# Altium PCB нижняя плата версия 1.PcbDoc
Units mm, origin at the board's own origin, x right, y up, seen from the top; angles counter-clockwise.
Board outline 60 x 53 mm, 4 copper layers (Top Layer, Layer 1, Layer 2, Bottom Layer), stack 0.603 mm thick; 106 components, 101 nets, 524 pads, 61 vias.
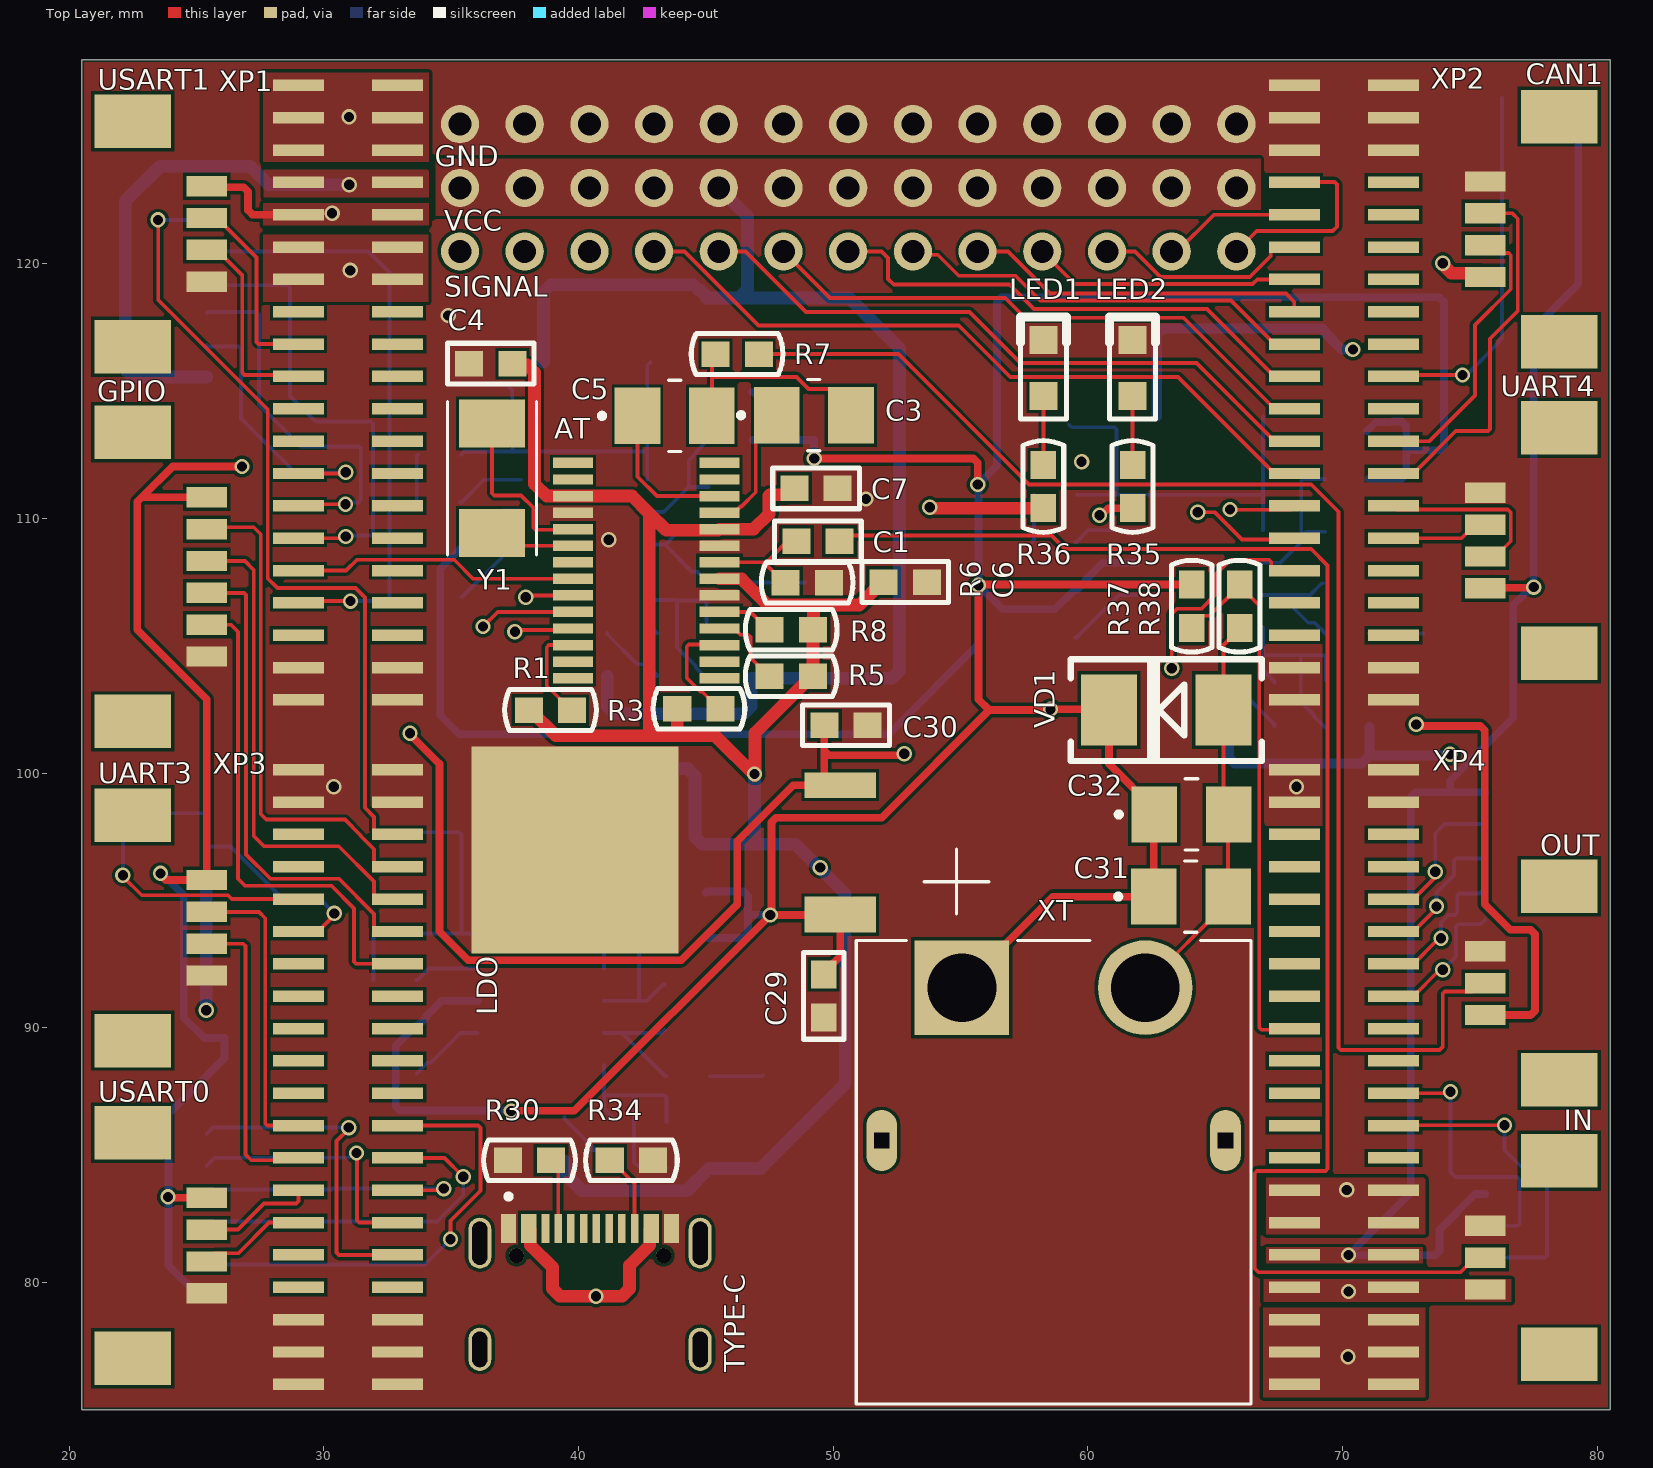
[diagram p0: Top Layer view]
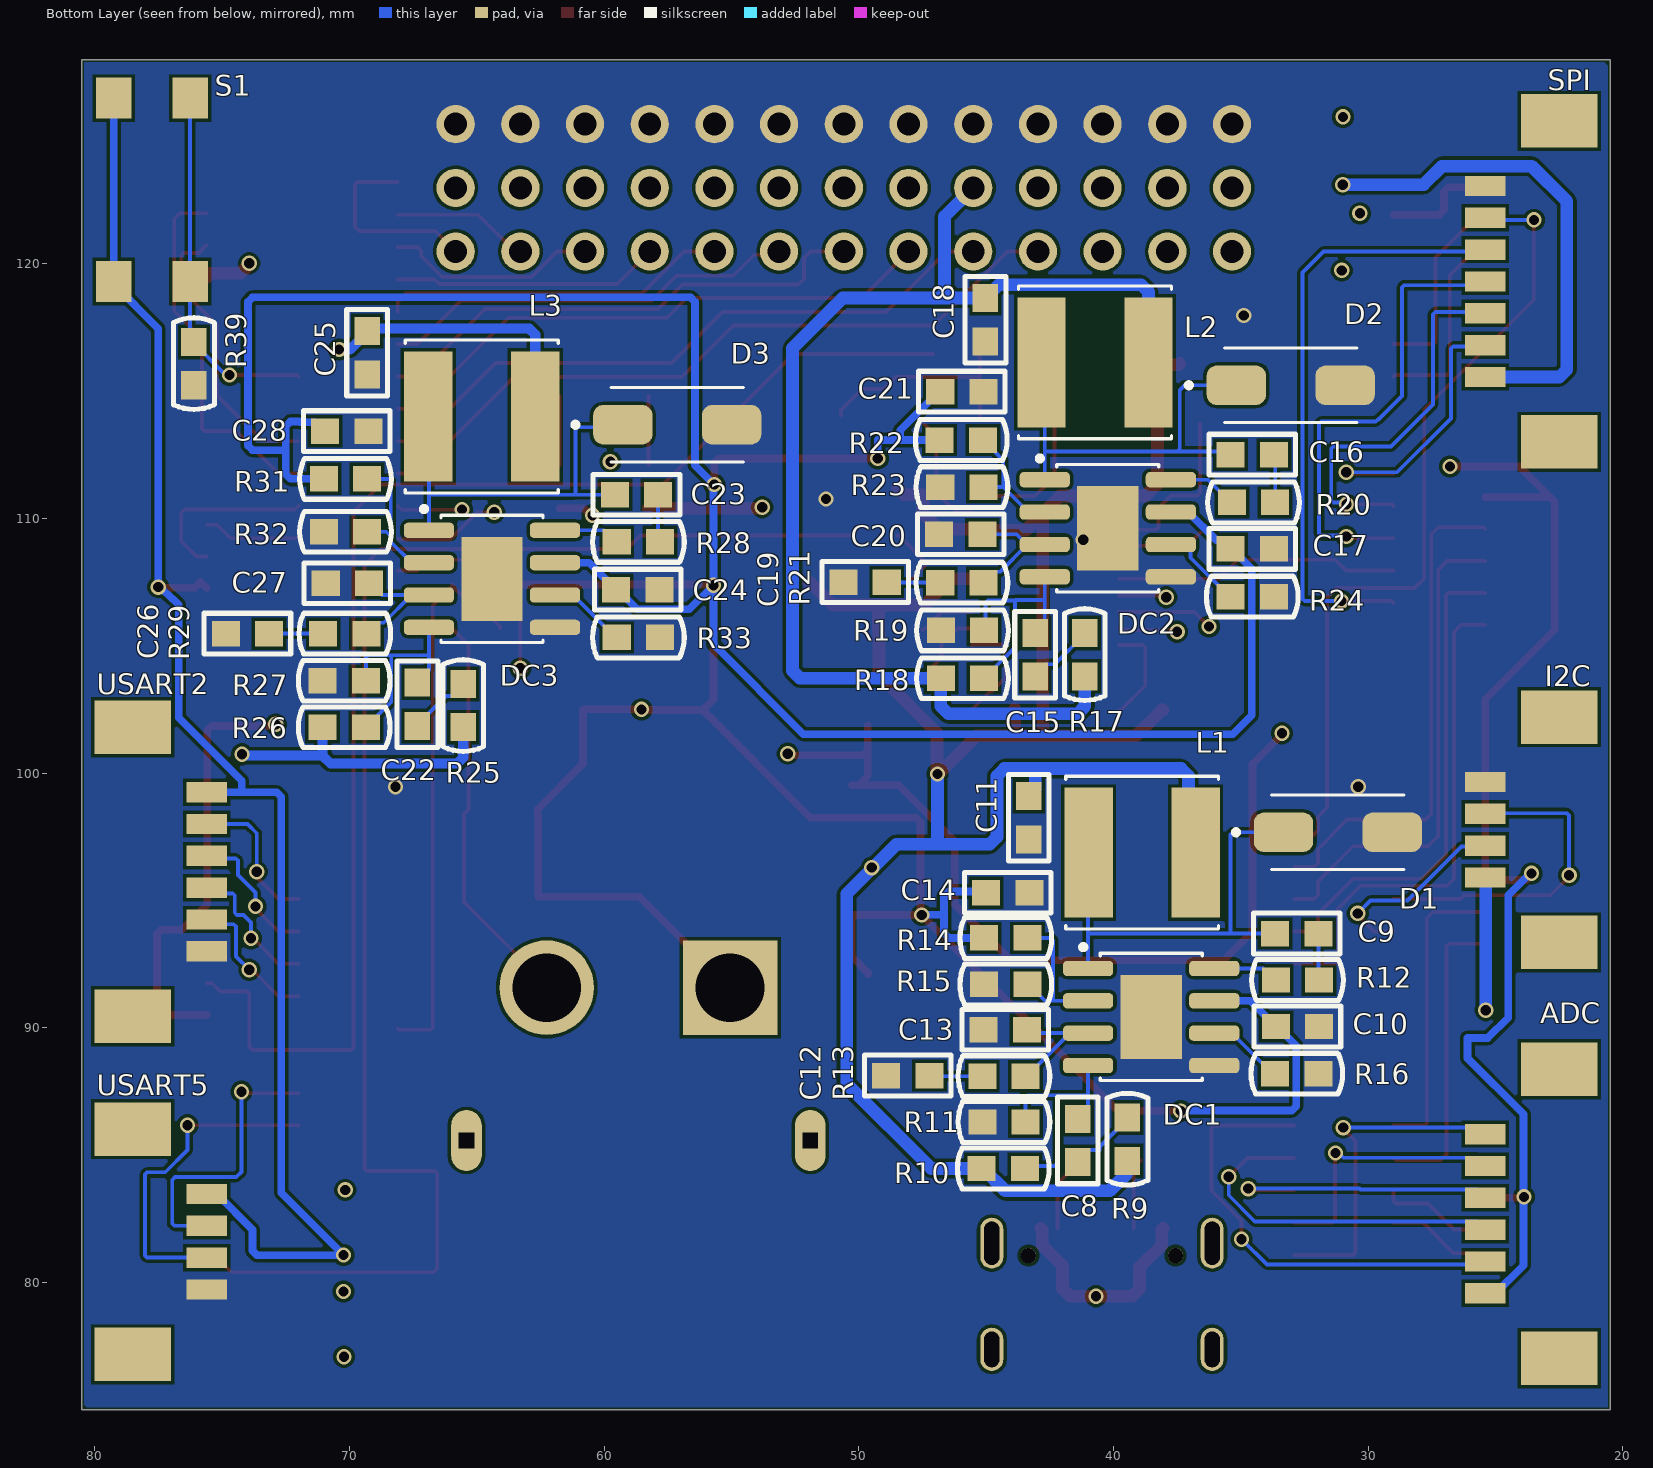
[diagram p1: Bottom Layer view, seen from below]
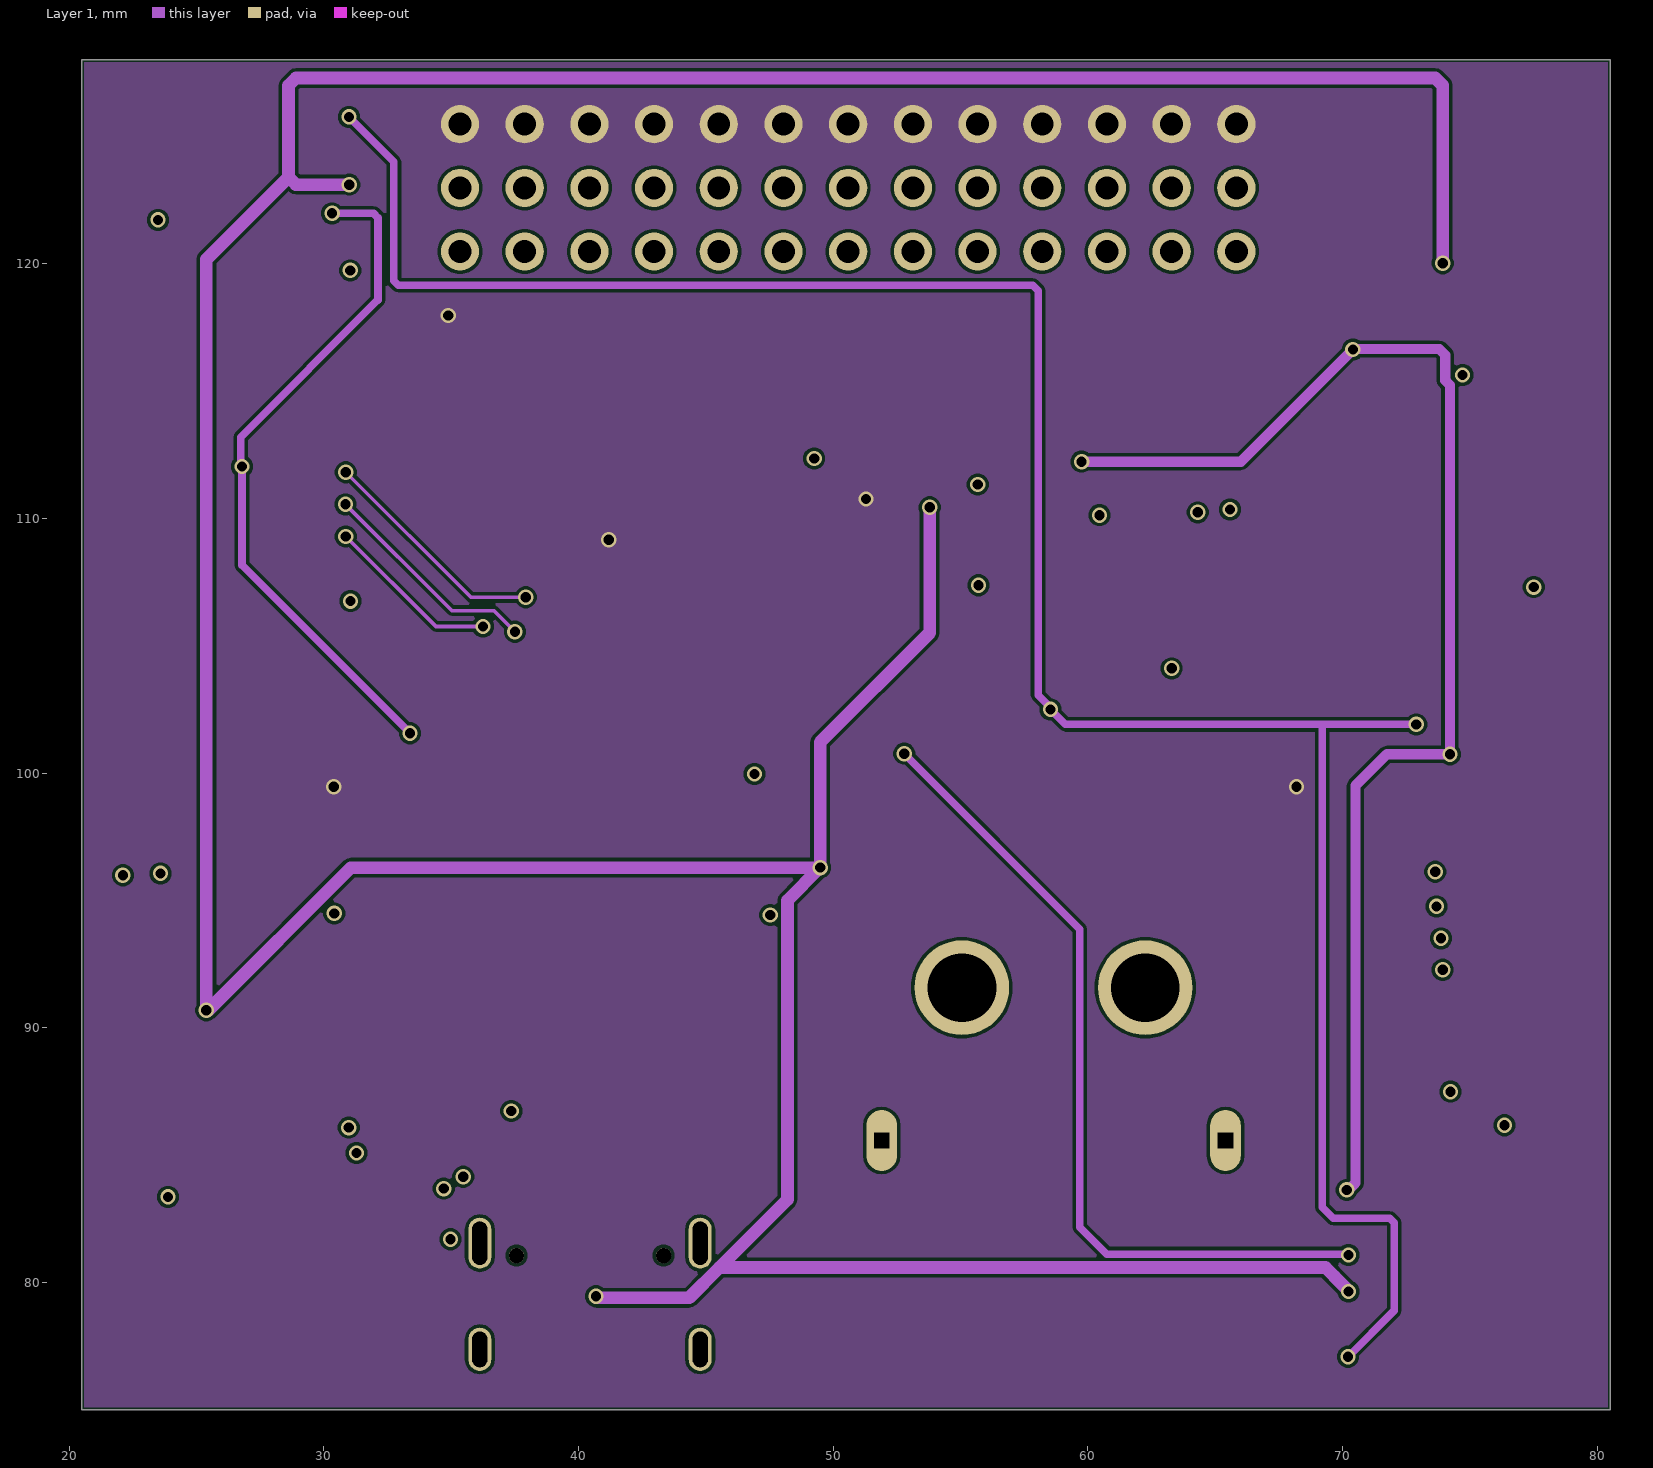
[diagram p2: Layer 1]
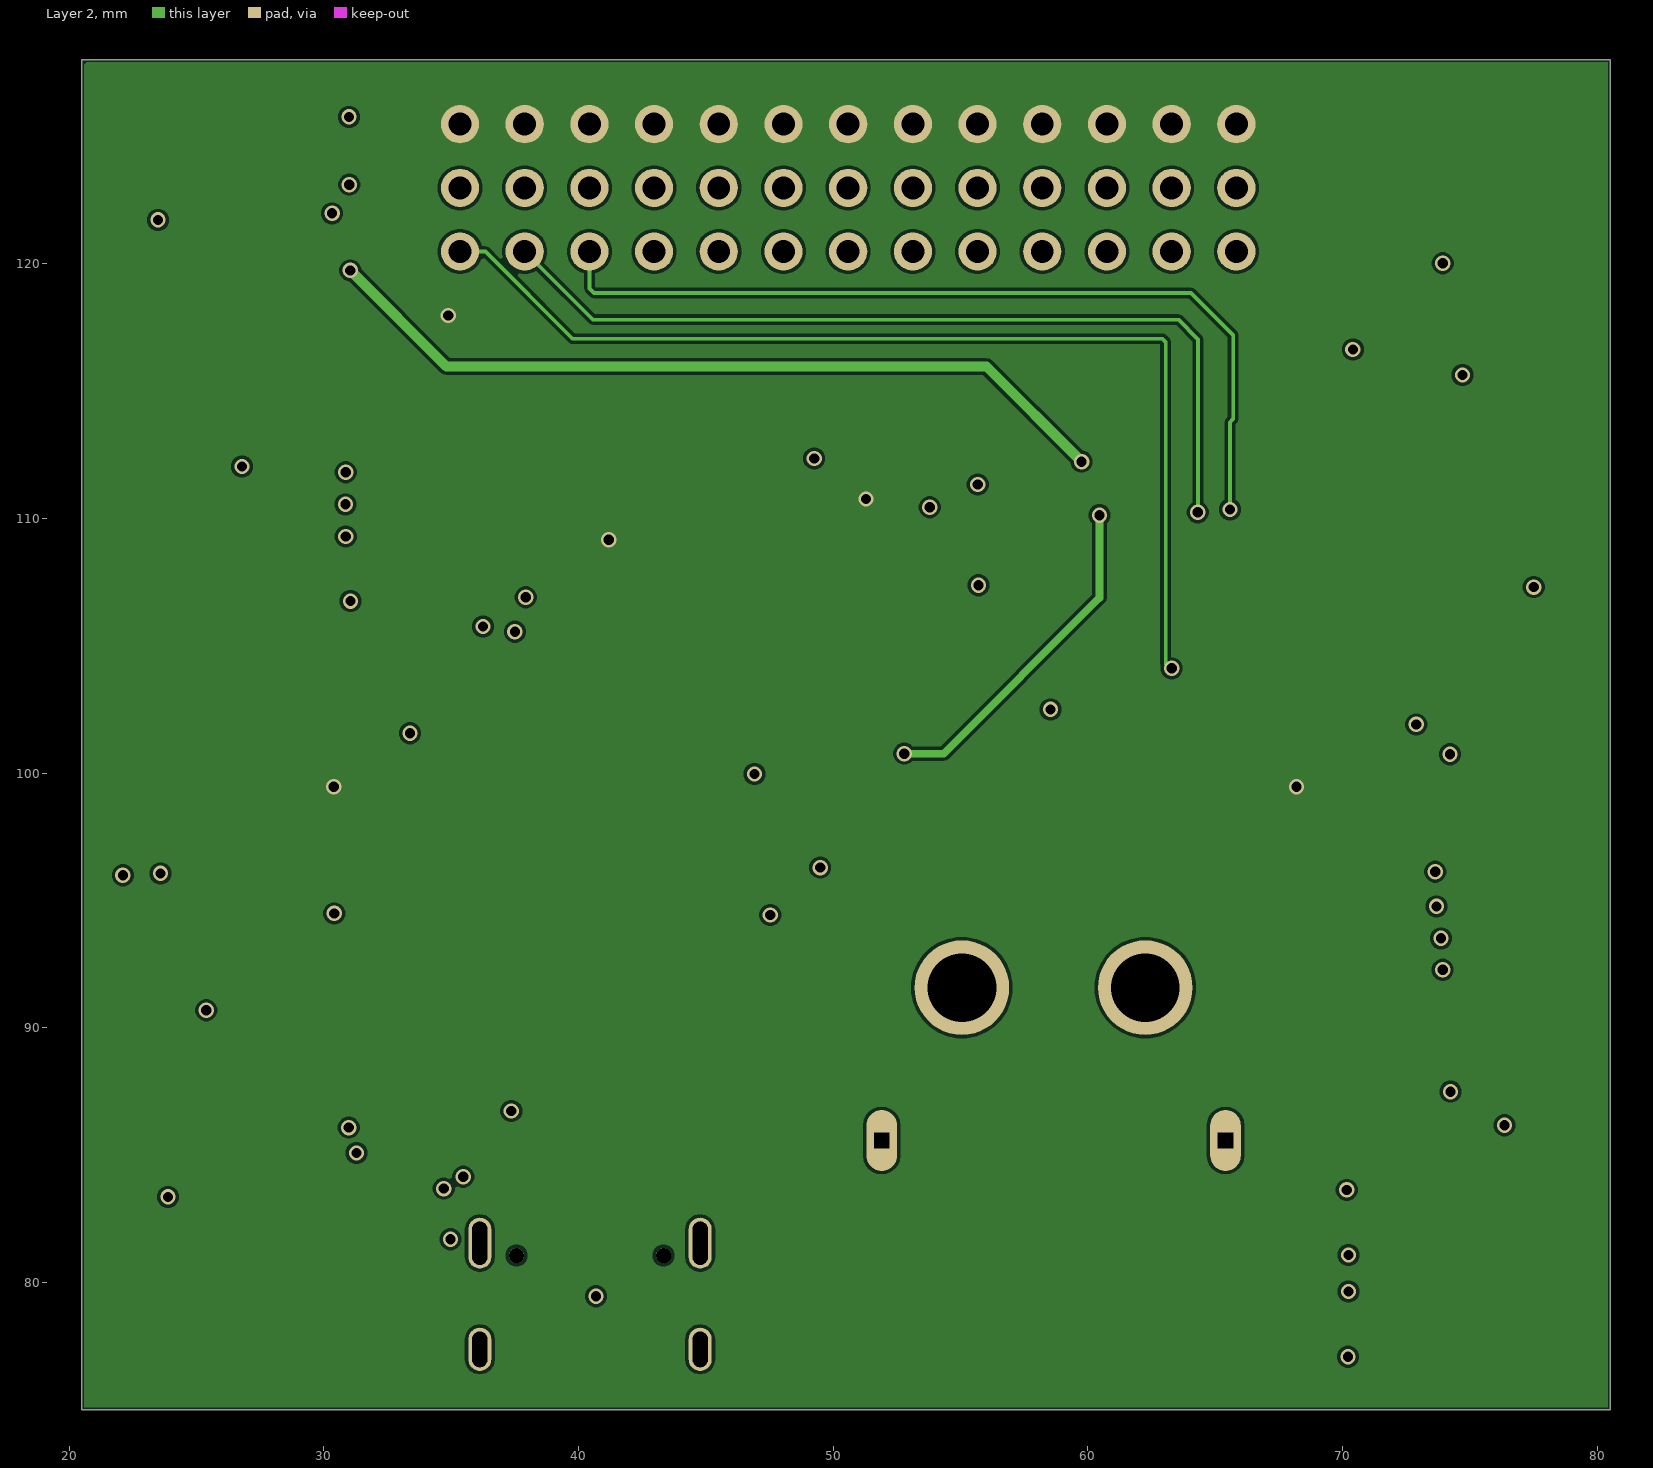
[diagram p3: Layer 2]
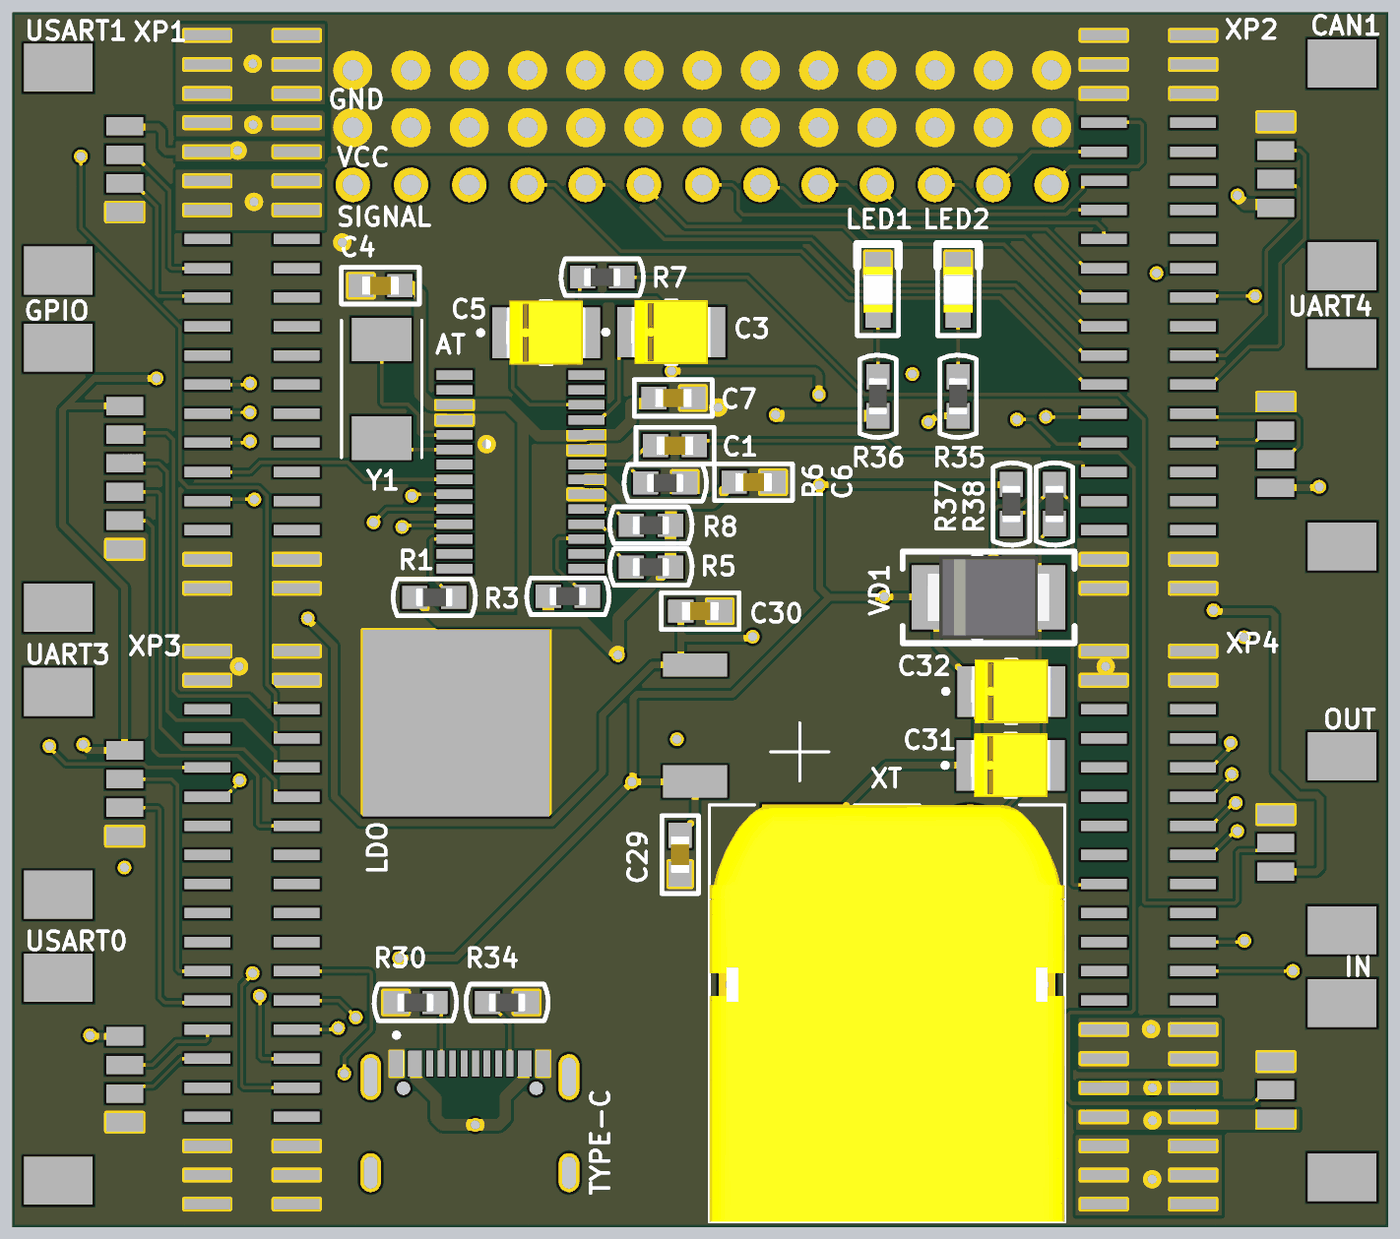
[diagram p4: 3D render of the assembled board from above, using the file's embedded part models]
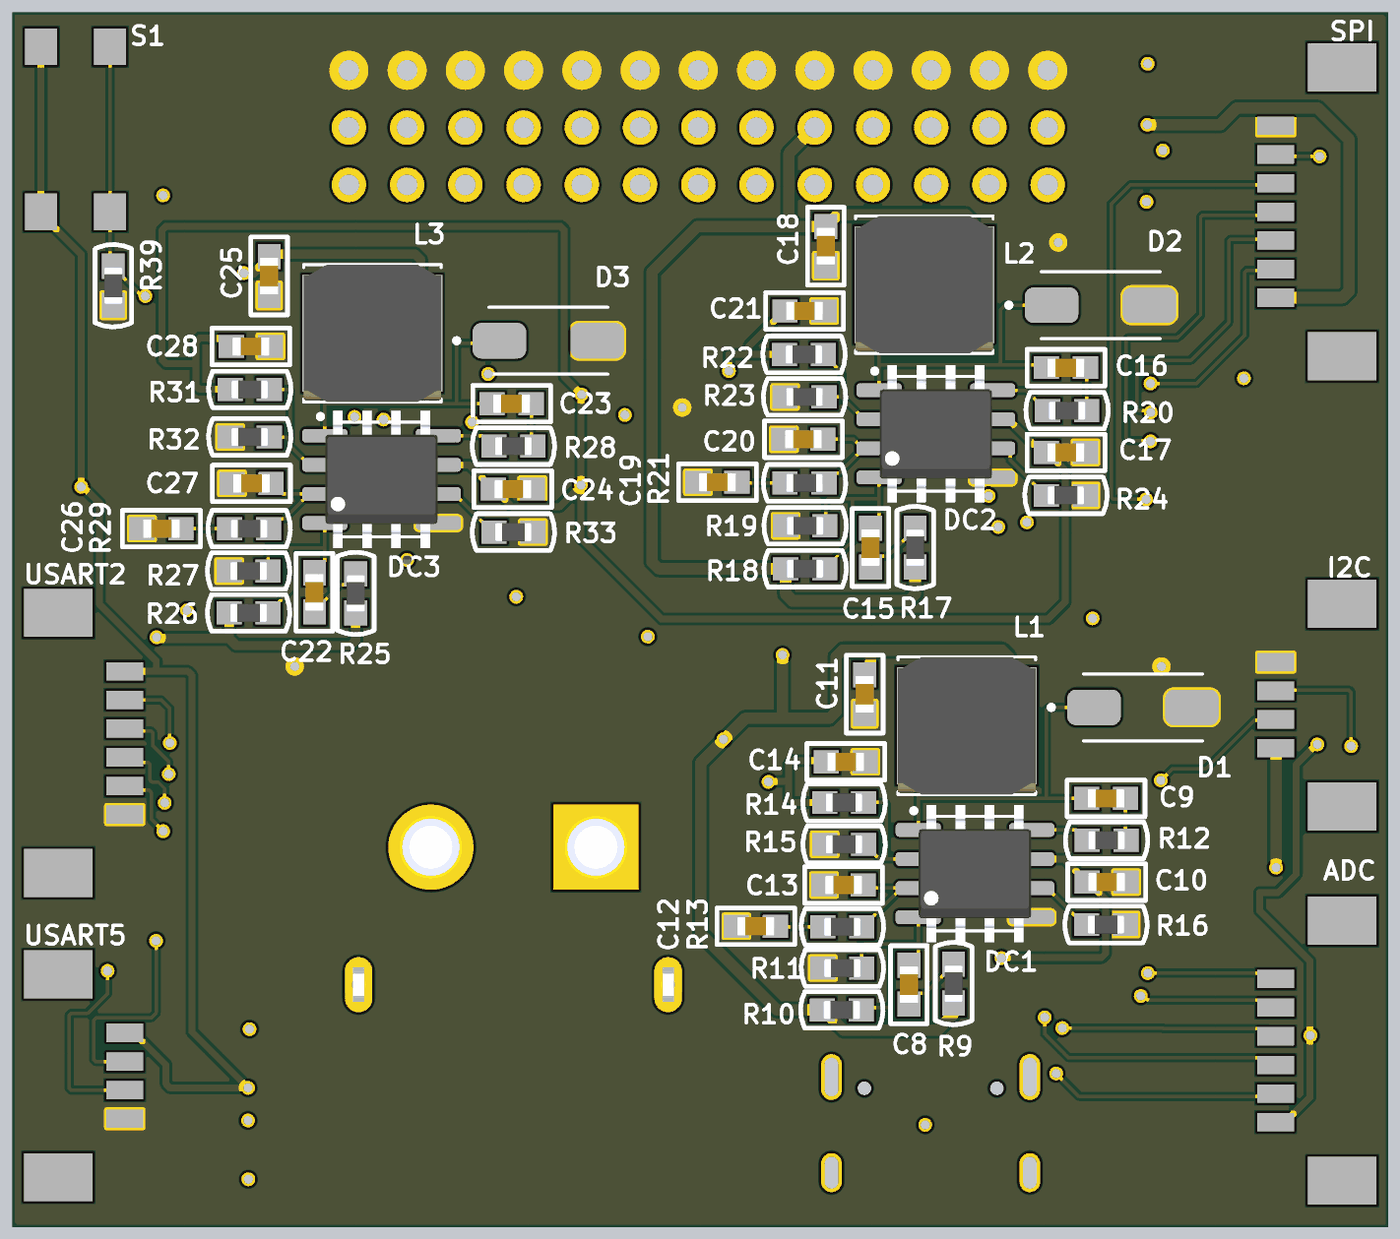
[diagram p5: 3D render of the assembled board from below, using the file's embedded part models]

## Layer stack, top to bottom
Top Solder: solder mask 0.0102, Solder Resist, Dk 3.5
Top Layer: signal copper 0.0356
Dielectric 2: prepreg 0.0711, PP-006, Dk 4.1
Layer 1: signal copper 0.035
Dielectric 1: dielectric 0.32, FR-4, Dk 4.8
Layer 2: signal copper 0.035
Dielectric 3: prepreg 0.0711, PP-006, Dk 4.1
Bottom Layer: signal copper 0.0356
Bottom Solder: solder mask 0.0102, Solder Resist, Dk 3.5

## Board outline
20.5,75 80.5,75 80.5,128 20.5,128

## Design rules (kind name [scope] priority, off if disabled: settings)
Clearance [All] p1: gap=0.125 ignorepadtopadclearanceinfootprint=FALSE except(0: Arc-Hole Track-Hole SMDPad-Hole THPad-Hole Via-Hole Fill-Hole Poly-Hole Region-Hole Text-Hole; 0.2: Arc-Region Track-Region SMDPad-Region THPad-Region Via-Region Fill-Region Poly-Region Region-Region)
PolygonConnect [All] p1: connectstyle=Direct reliefconductorwidth=0.254 reliefentries=4 polygonreliefangle="90 Angle" airgapwidth=0.254
RoutingVias [All] p1: holewidth=0.4 width=0.6 viastyle="Through Hole" minholewidth=0.4 minwidth=0.6 maxholewidth=0.4 maxwidth=0.6
SolderMaskExpansion [All] p1: expansion=0.102 istentingtop=FALSE
Width Width_6 [InNet('SERVO')] p1: maxlimit=0.5 minlimit=0.5 preferedwidth=0.5 minimp=50.000000 maximp=50.000000 favimp=50.000000
Width Width_5 [InNet('VCC')] p2: maxlimit=0.3 minlimit=0.3 preferedwidth=0.3 minimp=50.000000 maximp=50.000000 favimp=50.000000
Width Width_4 [InNet('GND')] p3: maxlimit=0.6 minlimit=0.6 preferedwidth=0.6 minimp=50.000000 maximp=50.000000 favimp=50.000000
Width Width_3 [InNet('5V')] p4: maxlimit=0.5 minlimit=0.5 preferedwidth=0.5 minimp=50.000000 maximp=50.000000 favimp=50.000000
Width Width_2 [InNet('4V2')] p5: maxlimit=0.4 minlimit=0.4 preferedwidth=0.4 minimp=50.000000 maximp=50.000000 favimp=50.000000
Width Width_1 [InNet('3V3')] p6: maxlimit=0.3 minlimit=0.3 preferedwidth=0.3 minimp=50.000000 maximp=50.000000 favimp=50.000000
Width [All] p7: maxlimit=0.15 minlimit=0.15 preferedwidth=0.15 minimp=50.000000 maximp=50.000000 favimp=50.000000
30 further rules are at their usual default settings.

## Components (designator, comment, footprint, x,y, rotation, side; value= is the part's Value field where it differs from the comment)
ADC "Header 1x6" "PicoBlade 6pin" 23.75,82.64 r90 bottom
AT "AT7456" at7456 42.577,107.401 r0 top
C1 "Capacitor" C0603 49.4,109.1 r0 top
C3 "T493B105K025BC6120" CAPPM3528X210N 49.235,114.05 r0 top
C4 "Capacitor" C0603 36.55,116.075 r180 top
C5 "T493B105K025BC6120" CAPPM3528X210N 43.775,114.025 r0 top
C6 "Capacitor" C0603 52.825,107.5 r0 top
C7 "Capacitor" C0603 49.325,111.175 r0 top
C8 "22 pF" C0603 41.4,85.575 r90 bottom
C9 "0.1 uF" C0603 32.8,93.7 r0 bottom
C10 "0.1 uF" C0603 32.775,90.05 r0 bottom
C11 "22 uF" C0603 43.325,98.25 r270 bottom
C12 "330 pF" C0603 48.075,88.125 r0 bottom
C13 "1 pF" C0603 44.25,89.925 r0 bottom
C14 "4.7 uF" C0603 44.15,95.3 r0 bottom
C15 "22 pF" C0603 43.075,104.65 r90 bottom
C16 "0.1 uF" C0603 34.55,112.5 r0 bottom
C17 "0.1 uF" C0603 34.55,108.8 r0 bottom
C18 "22 uF" C0603 45.025,117.8 r270 bottom
C19 "330 pF" C0603 49.75,107.5 r0 bottom
C20 "1 pF" C0603 46,109.375 r0 bottom
C21 "4.7 uF" C0603 45.95,114.975 r0 bottom
C22 "22 pF" C0603 67.325,102.7 r90 bottom
C23 "0.1 uF" C0603 58.725,110.925 r0 bottom
C24 "0.1 uF" C0603 58.675,107.2 r0 bottom
C25 "33 uF" C0603 69.3,116.5 r270 bottom
C26 "330 pF" C0603 74,105.475 r0 bottom
C27 "2 pF" C0603 70.075,107.45 r0 bottom
C28 "4.7 uF" C0603 70.1,113.425 r0 bottom
C29 "0.1 uF" C0603 49.625,91.25 r90 top
C30 "10 uF" C0603 50.5,101.875 r180 top
C31 "T493B105K025BC6120" CAPPM3528X210N 64.04,95.15 r0 top
C32 "T493B105K025BC6120" CAPPM3528X210N 64.065,98.375 r0 top
CAN1 "Header 1x4" "PicoBlade 4pin" 77.125,121.315 r90 top
D1 "B340A-13-F" DIOM5226X240N 31.19,97.675 r180 bottom
D2 "B340A-13-F" DIOM5226X240N 33.04,115.225 r180 bottom
D3 "B340A-13-F" DIOM5226X240N 57.125,113.675 r180 bottom
DC1 "MP1584EN" SOIC127P600X170-9N 38.518,90.425 r180 bottom
DC2 "MP1584EN" SOIC127P600X170-9N 40.222,109.611 r180 bottom
DC3 "MP1584EN" SOIC127P600X170-9N 64.4,107.625 r180 bottom
GND "SERVO" SERV 50.458,125.475 r0 top
GPIO "Header 1x6" "PicoBlade 6pin" 23.75,107.76 r270 top
I2C "I2C 1x4" "PicoBlade 4pin" 23.875,97.74 r90 bottom
IN "IN 1x3" "PicoBlade 3pin" 78.25,81.015 r90 top
L1 "12.3 uH" IND_VLS6045EX-150M 38.875,96.875 r180 bottom
L2 "12.3 uH" IND_VLS6045EX-150M 40.725,116.125 r180 bottom
L3 "12.3 uH" IND_VLS6045EX-150M 64.8,114 r180 bottom
LDO "КФ1158Н" ТО-263 49.253,94.318 r90 top
LED1 "Text" LD0805 58.25,115.9 r90 top
LED2 "Text" LD0805 61.75,115.9 r90 top
OUT "OUT 1x3" "PicoBlade 3pin" 78.25,91.79 r90 top
R1 "1 kOm" R0603 38.9,102.475 r180 top
R3 "1 kOm" R0603 44.725,102.525 r180 top
R5 "1 kOm" R0603 48.35,103.8 r0 top
R6 "10 kOm" R0603 48.975,107.475 r180 top
R7 "10 kOm" R0603 46.225,116.45 r0 top
R8 "10 kOm" R0603 48.35,105.625 r0 top
R9 "0" R0603 39.45,85.625 r270 bottom
R10 "124 kOm" R0603 44.325,84.475 r0 bottom
R11 "23.7 kOm" R0603 44.3,86.3 r0 bottom
R12 "0" R0603 32.775,91.875 r0 bottom
R13 "76.8 kOm" R0603 44.3,88.1 r180 bottom
R14 "100 kOm" R0603 44.225,93.525 r0 bottom
R15 "18.7 kOm" R0603 44.225,91.7 r0 bottom
R16 "193.38 kOm" R0603 32.8,88.2 r180 bottom
R17 "0" R0603 41.125,104.65 r270 bottom
R18 "124 kOm" R0603 45.925,103.725 r0 bottom
R19 "23.7 kOm" R0603 45.925,105.6 r0 bottom
R20 "0" R0603 34.5,110.625 r0 bottom
R21 "76.8 kOm" R0603 45.95,107.475 r180 bottom
R22 "100 kOm" R0603 45.975,113.075 r0 bottom
R23 "18.7 kOm" R0603 45.95,111.225 r0 bottom
R24 "193.38 kOm" R0603 34.55,106.925 r180 bottom
R25 "0" R0603 65.525,102.65 r270 bottom
R26 "124 kOm" R0603 70.2,101.8 r0 bottom
R27 "29 kOm" R0603 70.2,103.625 r0 bottom
R28 "0" R0603 58.65,109.075 r0 bottom
R29 "100 kOm" R0603 70.175,105.475 r180 bottom
R30 "10 kOm" R0603 38.075,84.8 r180 top
R31 "100 kOm" R0603 70.15,111.55 r0 bottom
R32 "18.7 kOm" R0603 70.15,109.475 r0 bottom
R33 "193.38 kOm" R0603 58.65,105.325 r180 bottom
R34 "10 kOm" R0603 42.075,84.8 r0 top
R35 "10 kOm" R0603 61.75,111.25 r270 top
R36 "10 kOm" R0603 58.25,111.25 r270 top
R37 "" R0603 64.075,106.55 r270 top
R38 "" R0603 65.95,106.55 r90 top
R39 "10 kOm" R0603 76.1,116.075 r90 bottom
S1 "SW-PB" SWIT 77.901,122.944 r270 bottom
SIGNAL "SERVO" SERV 50.458,120.475 r0 top
SPI "SPI 1x7" "PicoBlade 7pin" 25.375,119.265 r90 bottom
TYPE-C "TYPE-C-31-M-12" HRO_TYPE-C-31-M-12 40.45,77.375 r0 top
UART3 "UART 1x4" "PicoBlade 4pin" 23.875,93.96 r270 top
UART4 "UART 1x4" "PicoBlade 4pin" 77.125,109.09 r90 top
USART0 "UART 1x4" "PicoBlade 4pin" 23.875,81.485 r270 top
USART1 "UART 1x4" "PicoBlade 4pin" 23.875,121.2 r270 top
USART2 "UART 1x6" "PicoBlade 6pin" 77.25,96.185 r270 bottom
USART5 "UART 1x4" "PicoBlade 4pin" 77.125,81.635 r270 bottom
VCC "SERVO" SERV 50.458,122.975 r0 top
VD1 "Schottky" DO-214AA 63.075,102.475 r180 top
XP1 "PLLD-1.27-40S" "Headr 2x20 male" 30.947,115.149 r0 top
XP2 "PLLD-1.27-40S" "Headr 2x20 male" 70.047,115.149 r0 top
XP3 "PLLD-1.27-40S" "Headr 2x20 male" 30.947,88.279 r0 top
XP4 "PLLD-1.27-40S" "Headr 2x20 male" 70.047,88.279 r0 top
XT "XT60PW-M" AMASS_XT60PW-M 58.65,85.575 r180 top
Y1 "ABM7-8.000MHZ-8-R80-D2Y-T" XTAL_ABM7-8.000MHZ-8-R80-D2Y-T 36.6,111.575 r90 top

## Footprints (in the part's own frame and the unit in brackets; to place one, negate y for a bottom-side part, rotate by r counter-clockwise, add the part's x,y. Pads: shape width x height; smd on the part's side, far side on the other; paste and mask are expansions set on the pad)
AMASS_XT60PW-M [mm]
  rect 3.716x3.716 / inner round 3.716 / far side rect 3.716x3.716 hole 2.7: 1(3.6,-6)
  round 3.716 hole 2.7: 2(-3.6,-6)
  oval 1.2x2.4 hole 0.6 square: S1(6.75,0) S2(-6.75,0)
  silkscreen extent -7.75,-11.43 7.75,10.35, body extent -7.75,-7.85 7.75,10.35, height 8.4
at7456 [mm]
  rect 1.57x0.41 smd: 1(-2.794,4.774) 2(-2.794,4.124) 3(-2.794,3.474) 4(-2.794,2.824) 5(-2.794,2.174) 6(-2.794,1.524) 7(-2.794,0.874) 8(-2.794,0.224) 9(-2.794,-0.426) 10(-2.794,-1.076) 11(-2.794,-1.726) 12(-2.794,-2.376) 13(-2.794,-3.026) 14(-2.794,-3.676) 15(2.956,-3.676) 16(2.956,-3.026) 17(2.956,-2.376) 18(2.956,-1.726) 19(2.956,-1.076) 20(2.956,-0.426) 21(2.956,0.224) 22(2.956,0.874) 23(2.956,1.524) 24(2.956,2.174) 25(2.956,2.824) 26(2.956,3.474) 27(2.956,4.124) 28(2.956,4.774)
C0603 [mm] "1608M"
  rect 1.1x1 smd: 1(-0.85,0) 2(0.85,0)
  silkscreen extent -1.7,-0.8 1.7,0.8, body extent -0.8,-0.4 0.8,0.4, height 0.91
CAPPM3528X210N [mm]
  rect 1.79x2.21 smd: 1(-1.46,0) 2(1.46,0)
  silkscreen extent -2.95,-1.4 0.25,1.4, body extent -1.75,-1.4 1.75,1.4, height 2.1
DIOM5226X240N [mm]
  rrect50% 2.33x1.55 smd: A(2.135,0) C(-2.135,0)
  silkscreen extent -4.1,-1.46 2.6,1.46
DO-214AA [mm] "(SMB) Low profile package"
  rect 2.2x2.8 smd: 1(-2.25,0) 2(2.25,0)
  silkscreen extent -3.75,-2 3.75,2, body extent -2.7,-1.8 2.7,1.8, height 2.3
"Headr 2x20 male" [mm]
  rect 2x0.45 smd: 1(-1.947,11.851) 2(1.953,11.851) 3(-1.947,10.581) 4(1.953,10.581) 5(-1.947,9.311) 6(1.953,9.311) 7(-1.947,8.041) 8(1.953,8.041) 9(-1.947,6.771) 10(1.953,6.771) 11(-1.947,5.501) 12(1.953,5.501) 13(-1.947,4.231) 14(1.953,4.231) 15(-1.947,2.961) 16(1.953,2.961) 17(-1.947,1.691) 18(1.953,1.691) 19(-1.947,0.421) 20(1.953,0.421) 21(-1.947,-0.849) 22(1.953,-0.849) 23(-1.947,-2.119) 24(1.953,-2.119) 25(-1.947,-3.389) 26(1.953,-3.389) 27(-1.947,-4.659) 28(1.953,-4.659) 29(-1.947,-5.929) 30(1.953,-5.929) 31(-1.947,-7.199) 32(1.953,-7.199) 33(-1.947,-8.469) 34(1.953,-8.469) 35(-1.947,-9.739) 36(1.953,-9.739) 37(-1.947,-11.009) 38(1.953,-11.009) 39(-1.947,-12.279) 40(1.953,-12.279)
HRO_TYPE-C-31-M-12 [mm]
  rect 0.6x1.14 smd mask+0.05: A1_B12(-3.2,4.75) A4_B9(-2.4,4.75) B1_A12(3.2,4.75) B4_A9(2.4,4.75)
  rect 0.3x1.14 smd mask+0.05: A5(-1.25,4.75) A6(-0.25,4.75) A7(0.25,4.75) A8(1.25,4.75) B5(1.75,4.75) B6(0.75,4.75) B7(-0.75,4.75) B8(-1.75,4.75)
  oval 0.9x2 hole 0.6 slot 1.7 at 90 deg: S1(-4.325,4.17) S2(4.325,4.17)
  oval 0.9x1.7 hole 0.6 slot 1.4 at 90 deg: S3(-4.325,0) S4(4.325,0)
  round 0.6 hole 0.6 unplated: ""(-2.89,3.68) ""(2.89,3.68)
  silkscreen extent -3.3,5.9 -3.1,6.1
IND_VLS6045EX-150M [mm]
  rect 1.9x5.1 smd: 1(-2.1,0) 2(2.1,0)
  silkscreen extent -3,-3 3,3, body extent -3,-3 3,3, height 4.5
LD0805 [mm]
  rect 1.1x1.1 smd: 1(-1.1,0) 2(1.1,0)
  silkscreen extent -2,-0.9 2,0.9, body extent -1,-0.62 1,0.63, height 0.73
"PicoBlade 3pin" [mm]
  rect 0.8x1.6 smd: 1(-1.29,2.65) 2(-0.04,2.65) 3(1.21,2.65)
  rect 2.1x3 smd: S(-3.84,-0.25) S(3.76,-0.25)
"PicoBlade 4pin" [mm]
  rect 0.8x1.6 smd: 1(-1.84,1.525) 2(-0.59,1.525) 3(0.66,1.525) 4(1.91,1.525)
  rect 2.1x3 smd: S(-4.39,-1.375) S(4.46,-1.375)
"PicoBlade 6pin" [mm]
  rect 0.8x1.6 smd: 1(-3.065,1.65) 2(-1.815,1.65) 3(-0.565,1.65) 4(0.685,1.65) 5(1.935,1.65) 6(3.185,1.65)
  rect 2.1x3 smd: S(-5.615,-1.25) S(5.735,-1.25)
"PicoBlade 7pin" [mm]
  rect 0.8x1.6 smd: 1(-3.715,0.025) 2(-2.465,0.025) 3(-1.215,0.025) 4(0.035,0.025) 5(1.285,0.025) 6(2.535,0.025) 7(3.785,0.025)
  rect 2.1x3 smd: S(-6.265,-2.875) S(6.335,-2.875)
R0603 [mm] "1608M"
  rect 1.1x1 smd: 1(-0.85,0) 2(0.85,0)
  silkscreen extent -1.8,-0.8 1.8,0.8, body extent -0.8,-0.4 0.8,0.4, height 0.38
SERV [mm]
  round 1.5 hole 0.9: 1(-15.113,0) 2(-12.573,0) 3(-10.033,0) 4(-7.493,0) 5(-4.953,0) 6(-2.413,0) 7(0.127,0) 8(2.667,0) 9(5.207,0) 10(7.747,0) 11(10.287,0) 12(12.827,0) 13(15.367,0)
SOIC127P600X170-9N [mm]
  rrect54% 1.97x0.6 smd: 1(-2.475,1.905) 2(-2.475,0.635) 3(-2.475,-0.635) 4(-2.475,-1.905) 5(2.475,-1.905) 6(2.475,-0.635) 7(2.475,0.635) 8(2.475,1.905)
  rect 2.41x3.3 smd paste-3: 9(0,0)
  silkscreen extent -2.77,-2.5 2,2.84, body extent -2.45,-3 2.45,3, height 1.7
SWIT [mm]
  rect 1.6x1.4 smd: 1(-3.556,1.651) 1(3.644,1.651) 2(-3.556,-1.349) 2(3.644,-1.349)
XTAL_ABM7-8.000MHZ-8-R80-D2Y-T [mm]
  rect 1.9x2.6 smd: 1(-2.15,0) 2(2.15,0)
  silkscreen extent -3,-1.75 3,1.75
ТО-263 [mm]
  rect 1.4x2.79 smd: 1(0.127,-1.022)
  rect 8.13x8.13 smd: 2(2.667,9.398)
  rect 0.99x2.79 smd: 3(5.207,-1.022)

## Part data
AT: "OSD"
C3 C5 C31 C32: "Tantalum Surface Mount Capacitors", Package="SMD-2 Kemet", Availability="In Stock", Check_prices=https://www.snapeda.com/parts/T493B105K025BC6120/KEMET/view-part/?ref=eda, MF=KEMET, MP=T493B105K025BC6120, Price=None, SnapEDA_Link=https://www.snapeda.com/parts/T493B105K025BC6120/KEMET/view-part/?ref=snap
C8 C9 C10 C11 C12 C13 C14 C15 C16 C17 C18 C19 C20 C21 C22 C23 C24 C25 C26 C27 C28 C29 C30: library part Capacitor, Published=18.05.2010, Publisher="Andrew Danich", Type=Конденсатор
D1 D2 D3: "Diode, Rectifier, 3a, 40v, Do-214ac, Full Reel", Package=None, Availability=Unavailable, MP=B340A-13-F, Price=None
L1 L2 L3: library part VLS6045EX-150M, "15 ÂµH Shielded Drum Core, Wirewound Inductor 2.5 A 75mOhm Nonstandard", Package="NON STANDARD-2 TDK", Availability="In Stock", Check_prices=https://www.snapeda.com/parts/VLS6045EX-150M/TDK/view-part/?ref=eda, MF=TDK, MP=VLS6045EX-150M, Price=None, Purchase-URL=https://pricing.snapeda.com/search/part/VLS6045EX-150M/?ref=eda, SnapEDA_Link=https://www.snapeda.com/parts/VLS6045EX-150M/TDK/view-part/?ref=snap
LED1 LED2: library part Led-1, Published=03.12.2013, Publisher="Andrew Danich", Type="Индикатор единичный"
R1 R3 R5 R6 R7 R8 R9 R10 R11 R12 R13 R14 R15 R16 R17 R18 R19 R20 R21 R22 R23 R24 R25 R26 R27 R28 R29 R30 R31 R32 R33 R34 R35 R36 R37 R38 R39: library part Resistor, Published=24.03.2010, Publisher="Andrew Danich", Type=Резистор
S1: "Switch", LatestRevisionDate=17-Jul-2002, LatestRevisionNote="Re-released for DXP Platform.", PackageDescription="Switch; 2 Leads", PackageReference=SPST-2, Published=24-Mar-1999, Publisher="Altium Limited"
Y1: "Crystal 22.1184MHz Ã‚Â±20ppm (Tol) Ã‚Â±30ppm (Stability) 18pF FUND 50Ohm 2-Pin Mini-CSMD T/R", Package=None, Availability=Unavailable, MP=ABM7-8.000MHZ-8-R80-D2Y-T, Price=None
C1 C4 C6 C7: Published=18.05.2010, Publisher="Andrew Danich", Type=Конденсатор
VD1: Published=18.05.2010, Publisher="Andrew Danich", Type=Диод

## Via types
v1: diameter 0.6, hole 0.4, Top Layer to Bottom Layer, 61 vias

## Nets (pads, with @x,y where several pads share a name; then routed paths per layer and width w, separated by ;. In a path a pad name is that pad's centre, name@x,y a point inside that pad or via, vN(x,y) a via of type N, cw(c..) or ccw(c..) an arc to the next point about the centre after c; other vN are vias at no path point)
3V3: ADC.1 C30.2 GPIO.1 LDO.3 R35.2 S1.2 UART3.1 UART4.1 USART0.1 USART1.1 USART2.1 USART5.1 XP1.9 XP1.10 XP4.31 XP4.32 | length 220.1
  Top Layer w0.3: v1@23.6,96 23.8,95.8 UART3.1 25.4,102.9 22.675,105.625 22.675,110.649 22.851,110.825 ; v1@23.886,83.325 USART0.1 ; GPIO.1 22.851,110.825 ; USART1.1 25.44,123 26.849,123 27.025,122.824 27.025,122.096 27.201,121.92 XP1.9 ; v1(26.788,112.036) 24.062,112.036 22.851,110.825 ; v1@33.4,101.5 34.538,100.362 34.538,93.783 35.676,92.645 44.034,92.645 46.229,94.84 46.229,97.33 48.425,99.525 LDO.3@49.995,99.525 ; C30.2 49.65,100.873 ; LDO.3 LDO.3@49.995,99.525 ; v1@52.8,100.7 49.823,100.7 49.65,100.873 ; v1(60.45,110.125) 60.525,110.125 60.8,110.4 R35.2 ; UART4.1 75.85,107.5 76.075,107.275 77.475,107.275 v1(77.5,107.3) ; 49.65,100.873 49.65,99.87 LDO.3@49.995,99.525
  Layer 1 w0.3: v1(30.325,121.975) 31.949,121.975 32.125,121.799 32.125,118.575 26.736,113.186 26.736,112.089 v1(26.788,112.036) 26.788,108.158 v1(33.386,101.561) ; v1(52.786,100.761) 59.675,93.872 59.675,82.175 60.736,81.114 70.186,81.114 v1(70.225,81.075)
  Layer 2 w0.3: v1(52.786,100.761) 54.336,100.761 60.45,106.875 v1(60.45,110.125)
  Bottom Layer w0.3: v1@23.6,96.1 24.5,95.2 24.5,90.4 25.3,89.6 26.1,89.6 26.1,88.8 23.9,86.6 23.9,80.675 25,79.575 ADC.1 ; USART5.1 75.2,83.475 73.8,82.075 73.8,81.251 73.624,81.075 v1(70.225,81.075) 72.675,83.525 72.675,99.074 72.851,99.25 74.225,99.25 ; USART2.1 74.225,99.25 ; S1.2@79.25,126.5 79.25,119.3 79.25,119.2 77.5,117.45 v1(77.5,107.3) 77.419,107.3 76.937,106.818 76.918,106.818 76.7,106.6 76.7,102.175 74.225,99.7 74.225,99.25
  other v1: 23.886,83.361 23.586,96.061
4V2: C25.1 L3.2 R25.2 R26.2 XP1.11 XP1.12 XP1.13 XP1.14 XP4.27 XP4.28 XP4.29 XP4.30 | length 106.7
  Layer 1 w0.4: v1(59.75,112.225) 66,112.225 v1(70.4,116.625) 70.425,116.65 73.791,116.65 74.025,116.416 74.025,115.416 74.211,115.231 v1(74.211,100.736) 71.736,100.736 70.5,99.5 70.5,83.9 v1@70.175,83.575
  Layer 2 w0.4: v1(31.036,119.736) 34.81,115.962 56.013,115.962 v1(59.75,112.225)
  Bottom Layer w0.4: L3.2 62.7,117.216 62.934,117.45 69.2,117.45 C25.1 69.3,117.3 69.975,116.625 v1(70.4,116.625) ; R25.2 65.525,100.609 65.759,100.375 70.741,100.375 71.05,100.684 ; R26.2 71.05,100.684 ; v1@74.225,100.675 74.216,100.684 71.05,100.684
  other v1: 70.161,83.636
5V: AT.3 AT.21 AT.24 C4.1 C6.1 C7.1 C11.1 CAN1.1 I2C.1 IN.1 L1.2 R1.2 R3.2 R5.2 R8.2 R9.2 R10.2 R36.2 SPI.1 TYPE-C.A4_B9 TYPE-C.B4_A9 XP1.7 XP1.8 XP4.33 XP4.34 | length 319.9
  Top Layer w0.5: C4.1 37.45,116.025 37.982,116.025 38.275,115.732 38.275,111.35 38.75,110.875 AT.3 42.1,110.875 42.772,110.203 ; TYPE-C.A4_B9 38.1,82.075 38.1,81.475 38.975,80.6 38.975,79.754 39.268,79.461 41.707,79.461 42,79.754 42,80.67 42.8,81.47 42.8,82.075 TYPE-C.B4_A9 ; R1.2 38.1,102.475 39.112,101.462 42.8,101.462 ; R3.2 43.875,101.487 43.85,101.462 ; AT.21 46.403,107.625 46.934,107.094 46.934,107.086 47.42,106.6 49.222,106.6 ; C7.1 48.225,110.925 47.518,110.925 47.475,110.882 47.475,110.175 46.875,109.575 AT.24 45.488,109.53 43.445,109.53 42.772,110.203 ; C6.1 51.925,107.5 51.025,106.6 49.222,106.6 ; v1@53.8,110.375 53.825,110.4 R36.2 ; v1@73.95,119.95 74.275,119.625 75.45,119.625 CAN1.1 ; 42.772,110.203 42.772,101.49 42.8,101.462 ; 42.8,101.462 43.85,101.462 ; 43.85,101.462 45.363,101.462 46.925,99.9 46.925,101.575 49.15,103.8 R5.2 R8.2 49.222,105.647 49.222,106.6
  Layer 1 w0.5: v1(25.386,90.686) 25.386,120.165 28.613,123.393 ; v1@25.423,90.648 31.061,96.286 v1(49.486,96.286) ; v1(31,123.1) 28.906,123.1 28.613,123.393 ; v1@40.7,79.4 44.347,79.4 45.536,80.589 ; v1(53.786,110.436) 53.786,105.511 49.486,101.211 v1(49.486,96.286) ; v1(70.225,79.65) 70.225,79.677 69.679,80.223 69.679,80.236 69.326,80.589 45.536,80.589 ; v1(73.927,120.016) 73.927,126.995 73.634,127.288 28.906,127.288 28.613,126.995 28.613,123.393 ; 45.536,80.589 48.2,83.253 48.2,95.001 v1(49.486,96.286)
  Bottom Layer w0.5: v1(25.386,90.686) 25.386,95.886 I2C.1 ; SPI.1 22.493,115.55 22.2,115.843 22.2,122.45 23.575,123.825 27.099,123.825 27.824,123.1 v1(31,123.1) ; L1.2 37.05,97.15 37.05,99.882 37.343,100.175 43.032,100.175 ; R9.2 39.475,84.75 39.475,84.268 40.143,83.6 44.25,83.6 45.125,84.475 R10.2 47.15,84.475 50.475,87.8 50.475,95.25 48.525,97.2 47.025,97.2 ; C11.1 43.075,99.35 43.075,100.132 43.032,100.175 ; v1(46.911,99.961) 46.911,97.314 47.025,97.2 ; 43.032,100.175 44.282,100.175 44.575,99.882 44.575,97.493 44.868,97.2 47.025,97.2
  other v1: 40.686,79.461
GND: AT.4 AT.20 AT.23 C4.2 C6.2 C7.2 C10.1 C11.2 C12.2 C13.2 C14.1 C17.1 C18.2 C19.2 C20.2 C21.1 C24.1 C25.2 C26.2 C27.2 C28.1 C29.1 C30.1 CAN1.4 D1.A D2.A D3.A DC1.5 DC1.9 DC2.5 DC2.9 DC3.5 DC3.9 GND.1 GND.2 GND.3 GND.4 GND.5 GND.6 GND.7 GND.8 GND.9 GND.10 GND.11 GND.12 GND.13 GPIO.6 I2C.4 IN.3 LDO.2 LED1.2 LED2.2 OUT.3 R6.1 R11.2 R15.2 R16.2 R19.2 R23.2 R24.2 R27.2 R30.2 R32.2 R33.2 R34.2 R39.1 SPI.7 TYPE-C.A1_B12 TYPE-C.B1_A12 UART3.4 UART4.4 USART0.4 USART1.4 USART2.6 USART5.4 XP1.37 XP1.38 XP1.39 XP1.40 XP2.1 XP2.2 XP2.3 XP2.4 XP2.5 XP2.6 XP2.37 XP2.38 XP2.39 XP2.40 XP3.1 XP3.2 XP3.3 XP3.4 XP3.35 XP3.36 XP3.37 XP3.38 XP3.39 XP3.40 XP4.1 XP4.2 XP4.3 XP4.4
  other v1: 30.386,99.461 68.186,99.461 41.186,109.161 51.286,110.761 34.886,117.961
NetADC_2: ADC.2 XP3.24 | length 18.2
  Top Layer w0.15: XP3.24 36.062,86.16 36.15,86.072 36.15,83.6 34.975,82.425 v1(34.975,81.7)
  Bottom Layer w0.15: ADC.2 25.525,80.7 33.975,80.7 v1(34.975,81.7)
NetADC_3: ADC.3 XP3.26 | length 14.2
  Top Layer w0.15: XP3.26 34.735,84.89 v1(35.475,84.15)
  Bottom Layer w0.15: ADC.3 25.725,82.4 34.45,82.4 35.475,83.425 v1(35.475,84.15)
NetADC_4: ADC.4 XP3.28 | length 11.3
  Top Layer w0.15: XP3.28 34.72,83.62 v1@34.725,83.625
  Bottom Layer w0.15: ADC.4 25.725,83.65 30.296,83.65 30.33,83.684 v1(34.708,83.684)
NetADC_5: ADC.5 XP3.30 | length 10.3
  Top Layer w0.15: v1@31.3,85.025 31.3,82.438 31.388,82.35 XP3.30
  Bottom Layer w0.15: ADC.5 25.725,84.9 30.978,84.9 31.164,85.086 v1(31.286,85.086)
NetADC_6: ADC.6 XP3.32 | length 13.2
  Top Layer w0.15: v1@30.975,86.025 30.5,85.55 30.5,81.175 30.595,81.08 XP3.32
  Bottom Layer w0.15: ADC.6 25.654,86.079 v1(30.977,86.079)
NetAT_5: AT.5 Y1.2 | length 7
  Top Layer w0.15: Y1.2 36.6,110.988 36.688,110.9 37.739,110.9 38.225,110.414 38.225,109.638 38.313,109.55 39.758,109.55 AT.5
NetAT_6: AT.6 Y1.1 | length 3.4
  Top Layer w0.15: Y1.1 37.1,108.925 AT.6
NetAT_8: AT.8 XP1.31 | length 11.3
  Top Layer w0.15: XP1.31 30.875,107.95 31.3,108.375 35.117,108.375 35.867,107.625 AT.8
NetAT_9: AT.9 SPI.2 XP1.25 | length 22
  Top Layer w0.15: XP1.25 30.865,111.76 v1@30.875,111.75 ; v1(37.925,106.9) 38,106.975 AT.9
  Layer 1 w0.15: v1(30.861,111.811) 35.772,106.9 v1(37.925,106.9)
  Bottom Layer w0.15: SPI.2 25.45,116.75 26.662,116.75 26.75,116.662 26.75,113.925 28.864,111.811 v1(30.861,111.811)
NetAT_10: AT.10 SPI.4 XP1.29 | length 29.3
  Top Layer w0.15: XP1.29 30.87,109.22 v1@30.875,109.225 ; v1(36.25,105.75) 36.825,106.325 AT.10
  Layer 1 w0.15: v1(30.861,109.286) 34.397,105.75 v1(36.25,105.75)
  Bottom Layer w0.15: SPI.4 25.55,119.15 28.587,119.15 28.675,119.062 28.675,114.8 29.6,113.875 29.625,113.875 29.7,113.8 31.837,113.8 31.925,113.712 31.925,109.413 31.837,109.325 30.899,109.325 v1(30.861,109.286)
NetAT_11: AT.11 SPI.3 XP1.27 | length 26
  Top Layer w0.15: XP1.27 29.06,110.55 v1(30.85,110.55) ; v1(37.5,105.55) 37.562,105.612 39.72,105.612 AT.11
  Layer 1 w0.15: v1(30.85,110.55) 35.025,106.375 36.675,106.375 v1(37.5,105.55)
  Bottom Layer w0.15: SPI.3 25.45,118.1 27.362,118.1 27.45,118.012 27.45,114.475 29.1,112.825 31.362,112.825 31.45,112.737 31.45,110.713 31.362,110.625 30.925,110.625 v1(30.85,110.55)
NetAT_12: AT.12 R1.1 | length 4
  Top Layer w0.15: R1.1 39.7,102.475 38.75,103.425 38.75,104.937 38.838,105.025 AT.12
NetAT_17: AT.17 R3.1 | length 4.4
  Top Layer w0.15: AT.17 45.508,105.05 44.338,105.05 44.25,104.962 44.25,103.735 44.792,103.194 44.856,103.194 45.525,102.525 R3.1
NetAT_18: AT.18 R5.1 | length 3.2
  Top Layer w0.15: AT.18 46.113,105.675 46.358,105.43 46.662,105.43 46.75,105.342 46.75,104.525 47.025,104.25 47.025,104.225 47.45,103.8 R5.1
NetAT_19: AT.19 R8.1 | length 2.3
  Top Layer w0.15: AT.19 46.75,106.325 47.45,105.625 R8.1
NetAT_22: AT.22 C1.1 R6.2 | length 4.6
  Top Layer w0.15: AT.22 47.275,108.275 ; R6.2 48.075,107.475 47.325,108.225 47.275,108.275 ; C1.1@48.475,109.325 48.425,109.325 47.375,108.275 47.275,108.275
NetAT_25: AT.25 C3.1 | length 5.1
  Top Layer w0.15: AT.25 46.113,110.225 46.358,110.47 46.401,110.47 46.955,111.024 46.955,113.23 C3.1
NetAT_26: AT.26 C5.1 | length 5.9
  Top Layer w0.15: C5.1 42.315,111.635 43.075,110.875 AT.26
NetC1_2: C1.2 IN.2 | length 59.4
  Top Layer w0.15: C1.2@50.175,109.325 58.569,109.325 59.102,108.791 68.766,108.791 69.408,108.15 69.408,84.463 69.32,84.375 66.638,84.375 66.55,84.287 66.55,80.55 66.7,80.4 74.625,80.4 75.2,80.975 IN.2
NetC2_2: 
NetC3_2: C3.2 C5.2 R7.1 | length 8.7
  Top Layer w0.15: C5.2 45.235,115.55 ; R7.1 45.235,116.31 45.235,115.55 ; C3.2 50.695,114.26 49.875,115.08 49.028,115.08 48.555,115.552 45.237,115.552 45.235,115.55
NetC8_1: C8.1 R9.1 | length 2.8
  Bottom Layer w0.15: R9.1 39.45,86.425 40.55,85.325 40.55,85.2 40.975,85.2 41.4,84.775 C8.1
NetC8_2: C8.2 DC1.4 R10.1 R11.1 | length 9.7
  Bottom Layer w0.15: DC1.4 40.993,87.35 ; C8.2 40.993,86.832 40.993,87.35 ; R11.1 43.45,87.262 43.362,87.35 42.178,87.35 ; R10.1 43.375,84.575 42.325,84.575 42.178,84.722 42.178,87.35 ; 40.993,87.35 42.178,87.35
NetC9_1: C9.1 R12.1 | length 1.8
  Bottom Layer w0.15: R12.1 31.95,91.9 C9.1
NetC9_2: C9.2 D1.C DC1.1 L1.1 | length 17.9
  Bottom Layer w0.15: D1.C 35.312,97.675 35.4,97.587 35.4,93.7 ; C9.2 35.4,93.7 ; L1.1 40.993,96.857 40.993,93.65 ; DC1.1 40.993,93.65 ; 35.4,93.7 40.943,93.7 40.993,93.65
NetC12_1: C12.1 R13.1 | length 2.1
  Bottom Layer w0.15: R13.1 47.2,88.1 C12.1
NetC13_1: C13.1 DC1.3 R13.2 | length 4.9
  Bottom Layer w0.15: DC1.3 DC1.3@41.71,89.79 ; C13.1 43.265,89.79 DC1.3@41.71,89.79 ; R13.2 43.4,88.1 DC1.3@41.71,89.79
NetC15_1: C15.1 R17.1 | length 2.7
  Bottom Layer w0.15: R17.1 41.125,105.45 42.3,104.275 42.65,104.275 43.075,103.85 C15.1
NetC15_2: C15.2 DC2.4 R18.1 R19.1 | length 9.4
  Bottom Layer w0.15: DC2.4 42.697,106.792 ; C15.2 42.697,105.878 42.697,106.792 ; R18.1 45.025,103.725 44.6,104.15 44.6,104.2 43.87,104.93 43.87,106.775 ; R19.1 45.025,105.65 45.025,106.687 44.937,106.775 43.87,106.775 ; 42.697,106.792 43.852,106.792 43.87,106.775
NetC16_1: C16.1 R20.1 | length 1.9
  Bottom Layer w0.15: R20.1 33.65,112.45 C16.1
NetC16_2: C16.2 D2.C DC2.1 L2.1 | length 16.8
  Bottom Layer w0.15: D2.C 37.175,115.225 37.188,115.238 37.4,115.026 37.4,112.713 37.488,112.625 ; C16.2 35.525,112.625 37.488,112.625 ; DC2.1 42.697,112.575 ; L2.1 42.697,115.997 42.697,112.575 ; 37.488,112.625 42.647,112.625 42.697,112.575
NetC19_1: C19.1 R21.1 | length 2.1
  Bottom Layer w0.15: R21.1 48.875,107.475 C19.1
NetC20_1: C20.1 DC2.3 R21.2 | length 5
  Bottom Layer w0.15: DC2.3 DC2.3@43.382,108.976 ; R21.2 44.675,107.9 44.458,107.9 DC2.3@43.382,108.976 ; C20.1 43.806,109.375 43.407,108.976 DC2.3@43.382,108.976
NetC22_1: C22.1 R25.1 | length 2.5
  Bottom Layer w0.15: R25.1 65.525,103.45 65.95,103.025 66.2,103.025 67.325,101.9 C22.1
NetC22_2: C22.2 DC3.4 R26.1 R27.1 | length 9
  Bottom Layer w0.15: DC3.4 66.875,104.625 ; C22.2 67.325,103.6 66.875,104.05 66.875,104.625 ; R26.1 69.3,101.8 68.875,102.225 68.875,102.275 68.35,102.8 68.35,104.625 ; R27.1 69.35,104.537 69.262,104.625 68.35,104.625 ; 66.875,104.625 68.35,104.625
NetC23_1: C23.1 R28.1 | length 1.9
  Bottom Layer w0.15: R28.1 57.875,109.15 C23.1
NetC23_2: C23.2 D3.C DC3.1 L3.1 | length 16.3
  Bottom Layer w0.15: D3.C 59.36,113.575 61.037,113.575 61.125,113.487 61.125,110.95 61.15,110.925 ; C23.2 61.15,110.925 ; DC3.1 66.875,110.875 ; L3.1 66.875,113.975 66.875,110.875 ; 61.15,110.925 66.825,110.925 66.875,110.875
NetC26_1: C26.1 R29.1 | length 2.1
  Bottom Layer w0.15: R29.1 C26.1
NetC27_1: C27.1 DC3.3 R29.2 | length 4.9
  Bottom Layer w0.15: DC3.3 DC3.3@67.56,106.99 ; C27.1 69.175,107.45 68.715,106.99 DC3.3@67.56,106.99 ; R29.2 68.9,105.9 68.65,105.9 DC3.3@67.56,106.99
NetC31_2: C31.2 C32.2 R38.1 VD1.1 XT.2 | length 15.8
  Top Layer w0.15: XT.2 62.25,91.69 65.5,94.94 C31.2 65.5,98.35 C32.2 65.325,98.575 VD1.1 65.325,105.025 65.95,105.65 R38.1
NetCAN1_2: CAN1.2 XP2.24 | length 11.2
  Top Layer w0.15: XP2.24 73.405,113.03 75.2,114.825 75.2,117.592 76.6,118.992 76.6,120.331 76.512,120.419 75.906,120.419 CAN1.2
NetCAN1_3: CAN1.3 XP2.26 | length 14.6
  Top Layer w0.15: XP2.26 72.775,111.76 74.44,113.425 75.699,113.425 75.787,113.513 75.787,117.05 76.875,118.138 76.875,121.762 76.662,121.975 CAN1.3
NetCAN2_1: XP4.21
NetCAN2_4: XP4.23
NetDC1_2: DC1.2 R14.1 R15.1 | length 6.1
  Bottom Layer w0.15: DC1.2 42.375,91.06 ; R15.1 43.325,91.7 42.685,91.06 42.375,91.06 ; R14.1 42.463,93.525 42.375,93.437 42.375,91.06
NetDC1_6: DC1.6 R16.1 | length 3.1
  Bottom Layer w0.15: R16.1 34.075,88.625 34.193,88.625 35.358,89.79 DC1.6
NetDC1_8: DC1.8 R12.2 | length 2.6
  Bottom Layer w0.15: R12.2 33.675,91.875 34.13,92.33 DC1.8
NetDC2_2: DC2.2 R22.1 R23.1 | length 5
  Bottom Layer w0.15: DC2.2 43.346,110.246 44.325,111.225 ; R23.1 44.325,111.225 ; R22.1 45.075,113.075 44.65,112.65 44.65,112.6 44.325,112.275 44.325,111.225
NetDC2_6: DC2.6 R24.1 | length 3.4
  Bottom Layer w0.15: R24.1 35.45,106.925 36.976,108.451 36.976,108.758 37.194,108.976 DC2.6
NetDC2_8: DC2.8 R20.2 | length 2.8
  Bottom Layer w0.15: R20.2 35.4,110.625 36.291,111.516 DC2.8
NetDC3_2: DC3.2 R31.1 R32.1 | length 6.2
  Bottom Layer w0.15: DC3.2 67.56,108.26 68.375,109.075 68.375,109.3 ; R32.1 68.55,109.475 68.375,109.3 ; R31.1 68.463,111.55 68.375,111.462 68.375,109.3
NetDC3_6: DC3.6 R33.1 | length 3.1
  Bottom Layer w0.15: R33.1 59.55,105.325 61.215,106.99 DC3.6
NetDC3_8: DC3.8 R28.2 | length 2.6
  Bottom Layer w0.15: R28.2 59.55,109.075 60.005,109.53 DC3.8
NetGPIO_2: GPIO.2 XP3.8 | length 19.8
  Top Layer w0.15: GPIO.2 25.475,109.65 27.25,109.65 27.525,109.375 27.525,98.388 27.738,98.175 30.827,98.175 31.45,97.552 31.45,97.532 31.975,97.007 31.975,96.47 32.125,96.32 XP3.8
NetGPIO_3: GPIO.3 XP3.10 | length 19.4
  Top Layer w0.15: GPIO.3 26.9,108.325 27.25,107.975 27.25,97.525 27.65,97.125 30.587,97.125 31.975,95.737 31.975,95.2 32.125,95.05 XP3.10
NetGPIO_4: GPIO.4 XP3.12 | length 19.3
  Top Layer w0.15: GPIO.4 26.862,107.075 26.95,106.987 26.95,96.8 27.9,95.85 30.592,95.85 31.975,94.467 31.975,93.93 32.125,93.78 XP3.12
NetGPIO_5: GPIO.5 XP3.14 | length 19.9
  Top Layer w0.15: GPIO.5 26.35,105.825 26.625,105.55 26.625,95.85 26.9,95.575 30.3,95.575 31.187,94.688 31.187,92.598 31.275,92.51 XP3.14
NetI2C_2: I2C.2 XP3.11 | length 7.8
  Top Layer w0.15: XP3.11 29.775,93.78 30.425,94.43 v1@30.425,94.45
  Bottom Layer w0.15: I2C.2 25.437,97.113 26.337,97.113 28.45,95 29.902,95 v1(30.411,94.491)
NetI2C_3: I2C.3 XP3.9 | length 12.9
  Top Layer w0.15: v1@22.125,95.925 22.85,95.2 26.233,95.2 26.383,95.05 XP3.9
  Bottom Layer w0.15: v1(22.111,95.986) 22.111,98.337 22.198,98.425 25.375,98.425 I2C.3
NetLED1_1: LED1.1 R36.1 | length 2.7
  Top Layer w0.15: R36.1 LED1.1
NetLED2_1: LED2.1 R35.1 | length 2.7
  Top Layer w0.15: R35.1 LED2.1
NetOUT_2: OUT.2 R7.2 | length 54.5
  Top Layer w0.15: R7.2 52.567,116.45 57.682,111.335 68.763,111.335 69.84,110.258 69.84,89.213 69.928,89.125 73.8,89.125 73.925,89.25 73.925,91.337 74.013,91.425 75.063,91.425 75.388,91.75 OUT.2
NetR30_1: R30.1 TYPE-C.A5 | length 2.8
  Top Layer w0.15: R30.1 39.2,84.525 TYPE-C.A5
NetR34_1: R34.1 TYPE-C.B5 | length 3.1
  Top Layer w0.15: R34.1 41.275,84.8 42.2,83.875 TYPE-C.B5
NetR37_2: R37.2 R38.2 XP4.17 | length 21.7
  Top Layer w0.15: R37.2 64.075,105.75 64.5,106.175 64.775,106.175 R38.2@65.95,107.35 ; R38.2 R38.2@65.95,107.35 ; XP4.17 68.055,89.925 66.813,89.925 66.725,90.013 66.725,106.575 R38.2@65.95,107.35
NetR39_2: R39.2 S1.1 XP2.20 | length 14.3
  Top Layer w0.15: XP2.20 72.055,115.625 v1(74.7,115.625)
  Bottom Layer w0.15: v1(74.7,115.625) 74.786,115.711 74.936,115.711 76.1,116.875 R39.2 76.25,117.075 76.25,119.3 S1.1@76.25,126.5
NetSIGNAL_1: SIGNAL.1 XP2.31 | length 50.7
  Top Layer w0.15: v1(63.286,104.111) 63.286,106.243 63.492,106.45 64.458,106.45 65.012,107.005 65.012,107.795 65.592,108.375 67.106,108.375 67.194,108.287 67.194,108.1 67.344,107.95 XP2.31
  Layer 2 w0.15: SIGNAL.1 36.343,120.475 39.768,117.05 62.925,117.05 63.05,116.925 63.05,104.3 v1@63.3,104.05
NetSIGNAL_2: SIGNAL.2 XP2.29 | length 39
  Top Layer w0.15: v1(64.311,110.236) 64.982,110.236 66.043,109.175 68.055,109.175 XP2.29
  Layer 2 w0.15: SIGNAL.2 40.56,117.8 63.55,117.8 64.325,117.025 v1@64.325,110.175
NetSIGNAL_3: SIGNAL.3 XP2.27 | length 37
  Top Layer w0.15: v1(65.575,110.35) 65.585,110.34 67.95,110.34 XP2.27
  Layer 2 w0.15: SIGNAL.3 40.425,119.025 40.6,118.85 64.05,118.85 65.7,117.2 65.7,113.898 65.575,113.773 v1(65.575,110.35)
NetSIGNAL_4: SIGNAL.4 XP2.25 | length 28.7
  Top Layer w0.15: SIGNAL.4 44.161,120.475 47.061,117.575 54.925,117.575 56.95,115.55 63.535,115.55 67.325,111.76 XP2.25
NetSIGNAL_5: SIGNAL.5 XP2.23 | length 25.7
  Top Layer w0.15: SIGNAL.5 46.56,120.475 48.935,118.1 55.35,118.1 57.35,116.1 64.255,116.1 67.325,113.03 XP2.23
NetSIGNAL_6: SIGNAL.6 XP2.21 | length 22.6
  Top Layer w0.15: SIGNAL.6 49.87,118.65 56.75,118.65 57.525,117.875 63.75,117.875 67.325,114.3 XP2.21
NetSIGNAL_7: SIGNAL.7 XP2.19 | length 20
  Top Layer w0.15: SIGNAL.7 51.9,120.475 52.15,120.225 52.15,119.4 52.375,119.175 56.925,119.175 57.875,118.225 64.67,118.225 67.325,115.57 XP2.19
NetSIGNAL_8: SIGNAL.8 XP2.17 | length 16.5
  Top Layer w0.15: SIGNAL.8 53.25,120.35 54.1,120.35 54.925,119.525 57.15,119.525 58.125,118.55 65.615,118.55 67.325,116.84 XP2.17
NetSIGNAL_9: SIGNAL.9 XP2.15 | length 13.6
  Top Layer w0.15: SIGNAL.9 56.861,120.475 58.511,118.825 67.775,118.825 68.1,118.5 XP2.15
NetSIGNAL_10: SIGNAL.10 XP2.13 | length 10.5
  Top Layer w0.15: SIGNAL.10 59.48,119.2 66.464,119.2 66.644,119.38 XP2.13
NetSIGNAL_11: SIGNAL.11 XP2.11 | length 8.4
  Top Layer w0.15: SIGNAL.11 61.85,120.475 62.85,119.475 66.35,119.475 67.175,120.3 67.175,120.5 67.325,120.65 XP2.11
NetSIGNAL_12: SIGNAL.12 XP2.9 | length 5.4
  Top Layer w0.15: SIGNAL.12 63.5,120.475 64.945,121.92 XP2.9
NetSIGNAL_13: SIGNAL.13 XP2.7 | length 7.7
  Top Layer w0.15: SIGNAL.13 66.625,121.275 69.6,121.275 69.775,121.45 69.775,123.112 69.687,123.2 68.11,123.2 XP2.7
NetSPI_5: SPI.5 XP1.33 | length 24
  Top Layer w0.15: XP1.33 29.07,106.75 v1(31.05,106.75)
  Bottom Layer w0.15: SPI.5 25.475,120.475 31.75,120.475 32.575,119.65 32.575,106.838 32.487,106.75 v1(31.05,106.75)
NetSPI_6: SPI.6 XP3.6 | length 32.2
  Top Layer w0.15: v1@23.5,121.656 23.5,118.573 27.8,114.273 27.8,107.642 28.176,107.267 31.241,107.267 31.616,106.891 31.616,98.636 31.975,98.277 31.975,97.74 32.125,97.59 XP3.6
  Bottom Layer w0.15: v1(23.486,121.718) 25.318,121.718 SPI.6
NetUART3_2: UART3.2 XP3.23 | length 11.8
  Top Layer w0.15: UART3.2 27.45,94.55 27.7,94.3 27.7,86.248 27.788,86.16 XP3.23
NetUART3_3: UART3.3 XP3.25 | length 12
  Top Layer w0.15: UART3.3 26.837,93.3 26.925,93.212 26.925,85.025 27.15,84.8 28.91,84.8 XP3.25
NetUART4_2: UART4.2 XP2.28 | length 7.1
  Top Layer w0.15: XP2.28 72.14,110.35 76.483,110.35 76.6,110.233 76.6,109.1 76,108.5 UART4.2
NetUART4_3: UART4.3 XP2.30 | length 3.8
  Top Layer w0.15: XP2.30 74.67,109.22 75.2,109.75 UART4.3
NetUSART0_2: USART0.2 XP3.27 | length 4.5
  Top Layer w0.15: USART0.2 26.625,82.075 27.65,83.1 28.912,83.1 29,83.188 XP3.27
NetUSART0_3: USART0.3 XP3.29 | length 4.2
  Top Layer w0.15: USART0.3 25.725,81.15 26.65,81.15 27.85,82.35 XP3.29
NetUSART1_2: USART1.2 XP1.17 | length 7.6
  Top Layer w0.15: USART1.2 25.8,121.79 27.35,120.24 27.35,116.928 27.438,116.84 XP1.17
NetUSART1_3: USART1.3 XP1.19 | length 7.9
  Top Layer w0.15: USART1.3 25.8,120.54 26.8,119.54 26.8,115.713 26.888,115.625 28.945,115.625 XP1.19
NetUSART2_2: USART2.2 XP4.10 | length 5.9
  Top Layer w0.15: XP4.10 72.775,95.05 73.65,95.925 v1@73.65,96.2
  Bottom Layer w0.15: v1(73.636,96.124) 73.636,97.636 74,98 USART2.2
NetUSART2_3: USART2.3 XP4.12 | length 5.5
  Top Layer w0.15: XP4.12 72.775,93.78 73.7,94.705 v1@73.7,94.725
  Bottom Layer w0.15: v1(73.686,94.766) 73.686,95.311 74.375,96 74.375,96.562 74.463,96.65 75.5,96.65 USART2.3
NetUSART2_4: USART2.4 XP4.14 | length 5.6
  Top Layer w0.15: XP4.14 72.775,92.51 73.715,93.45 v1@73.875,93.45
  Bottom Layer w0.15: v1(73.861,93.511) 73.861,94.136 74.15,94.425 74.412,94.425 74.5,94.513 74.5,95.2 74.575,95.275 75.375,95.275 USART2.4
NetUSART2_5: USART2.5 XP4.16 | length 5.5
  Top Layer w0.15: XP4.16 72.775,91.24 73.735,92.2 v1@73.875,92.2
  Bottom Layer w0.15: v1(73.925,92.275) 74.45,92.8 74.45,93.975 74.538,94.063 75.413,94.063 USART2.5
NetUSART5_2: USART5.2 XP4.22 | length 11.3
  Top Layer w0.15: XP4.22 v1@74.25,87.43
  Bottom Layer w0.15: v1(74.236,87.491) 74.236,84.339 74.437,84.138 76.838,84.138 76.95,84.025 76.95,82.313 76.862,82.225 USART5.2
NetUSART5_3: USART5.3 XP4.24 | length 13
  Top Layer w0.15: XP4.24 72.015,86.175 v1(76.35,86.175)
  Bottom Layer w0.15: USART5.3 77.937,80.975 78.025,81.063 78.025,84.237 77.937,84.325 77.225,84.325 76.35,85.2 v1(76.35,86.175)
SERVO: C18.1 L2.2 R17.2 R18.2 VCC.1 VCC.2 VCC.3 VCC.4 VCC.5 VCC.6 VCC.7 VCC.8 VCC.9 VCC.10 VCC.11 VCC.12 VCC.13 | length 49.6
  Bottom Layer w0.5: L2.2 38.625,118.882 38.918,119.175 44.5,119.175 44.725,118.95 44.775,118.95 45.025,118.7 C18.1 46.282,118.65 ; R17.2 41.125,102.618 41.418,102.325 46.482,102.325 46.775,102.618 R18.2 52.307,103.725 52.6,104.018 52.6,116.675 50.625,118.65 46.282,118.65 ; VCC.5 46.63,121.85 46.63,118.998 46.282,118.65
VCC: C10.2 C14.2 C17.2 C21.2 C24.2 C28.2 C29.2 C31.1 C32.1 DC1.7 DC2.7 DC3.7 LDO.1 OUT.1 R14.2 R22.2 R31.2 R37.1 VD1.2 XP1.1 XP1.2 XP1.3 XP1.4 XP1.5 XP1.6 XP4.35 XP4.36 XP4.37 XP4.38 XP4.39 XP4.40 XT.1 | length 290.9
  Top Layer w0.3: v1(37.361,86.736) 39.836,86.736 v1(47.525,94.425) 50.255,94.425 LDO.1 50.275,92.8 49.625,92.15 C29.2 ; v1@47.575,94.475 47.575,98.074 47.751,98.25 51.9,98.25 56.125,102.475 ; v1(49.25,112.35) 55.499,112.35 55.675,112.174 v1(55.675,111.325) ; XT.1 58.625,95.15 C31.1 62.58,98.35 C32.1 62.605,98.585 60.825,100.365 VD1.2 60.8,102.5 v1(58.525,102.5) 58.5,102.475 56.125,102.475 ; R37.1 55.725,107.4 v1(55.7,107.375) 55.7,102.9 56.125,102.475 ; v1@72.875,101.825 72.9,101.85 75.399,101.85 75.575,101.674 75.575,94.85 76.575,93.85 77.374,93.85 77.55,93.674 77.55,90.676 77.374,90.5 OUT.1
  Layer 1 w0.3: v1(30.986,125.761) 32.75,123.997 32.75,119.326 32.926,119.15 57.824,119.15 58.043,118.931 58.043,103.063 58.525,102.581 v1(58.525,102.5) 59.114,101.911 69.2,101.911 ; v1(70.211,77.086) 72.025,78.901 72.025,82.349 71.849,82.525 69.625,82.525 69.2,82.95 69.2,101.911 ; v1(72.886,101.911) 69.2,101.911
  Bottom Layer w0.3: DC1.7 34.635,91.06 34.025,90.45 34.025,90.4 33.675,90.05 C10.2 33.575,90.05 32.825,89.3 32.825,86.926 33.001,86.75 v1@37.4,86.75 ; DC2.7 37.062,110.246 35.966,109.15 35.75,109.15 C17.2 35.35,108.8 34.575,108.025 34.575,102.275 35.325,101.525 52.175,101.525 55.7,105.05 v1(55.7,107.375) ; C14.2 45.05,95.35 46.474,95.35 46.65,95.174 46.65,94.437 ; R14.2 46.474,93.525 46.65,93.701 46.65,94.437 ; C21.2 46.85,114.975 48.375,113.45 48.375,113.075 ; R22.2 48.375,113.075 ; v1@47.6,94.425 47.587,94.437 46.65,94.437 ; v1@49.225,112.325 v1(49.25,112.35) 49.25,113.075 48.375,113.075 ; DC3.7 60.585,108.26 59.925,107.6 59.925,107.55 59.575,107.2 C24.2 59.475,107.2 58.7,106.425 56.65,106.425 v1(55.7,107.375) ; C28.2 71.3,113.775 71.95,113.775 71.975,113.8 72.324,113.8 72.5,113.624 72.5,112.675 ; R31.2 72.324,111.55 72.5,111.726 72.5,112.675 ; v1(55.7,107.375) 55.7,111.3 v1(55.675,111.325) 56.43,112.08 56.43,118.499 56.606,118.675 73.799,118.675 73.975,118.499 73.975,112.851 73.799,112.675 72.5,112.675
pads on no net: ADC.S AT.1 AT.2 AT.7 AT.13 AT.14 AT.15 AT.16 AT.27 AT.28 CAN1.S GPIO.S I2C.S IN.S OUT.S SPI.S TYPE-C. TYPE-C.A6 TYPE-C.A7 TYPE-C.A8 TYPE-C.B6 TYPE-C.B7 TYPE-C.B8 TYPE-C.S1 TYPE-C.S2 TYPE-C.S3 TYPE-C.S4 UART3.S UART4.S USART0.S USART1.S USART2.S USART5.S XP1.15 XP1.16 XP1.18 XP1.20 XP1.21 XP1.22 XP1.23 XP1.24 XP1.26 XP1.28 XP1.30 XP1.32 XP1.34 XP1.35 XP1.36 XP2.8 XP2.10 XP2.12 XP2.14 XP2.16 XP2.18 XP2.22 XP2.32 XP2.33 XP2.34 XP2.35 XP2.36 XP3.5 XP3.7 XP3.13 XP3.15 XP3.16 XP3.17 XP3.18 XP3.19 XP3.20 XP3.21 XP3.22 XP3.31 XP3.33 XP3.34 XP4.5 XP4.6 XP4.7 XP4.8 XP4.9 XP4.11 XP4.13 XP4.15 XP4.18 XP4.19 XP4.20 XP4.25 XP4.26 XT.S1 XT.S2

## Polygon pours and split planes (outlines as drawn)
GND on Top Layer "GND_L01_P011" (solid, remove dead copper, pour order 11): 20.6,127.9 80.4,127.9 80.4,75.1 20.6,75.1
4V2 on Top Layer "4V2_L01_P008" (solid, remove dead copper, pour order 8): 27.625,121.125 34.1,121.125 34.1,119 34.1,118.5 27.625,118.5
3V3 on Top Layer "3V3_L01_P007" (solid, remove dead copper, pour order 7): 27.65,122.375 27.625,122.35 27.625,121.5 34.125,121.5 34.125,122.375
5V on Top Layer "5V_L01_P006" (solid, remove dead copper, pour order 6): 27.65,123.688 27.65,122.625 27.675,122.6 34.125,122.6 34.125,123.713
VCC on Top Layer "VCC_L01_P005" (solid, remove dead copper, pour order 5): 27.625,127.5 27.625,124 34.125,124 34.125,127.5
SERVO on Top Layer "SERVO_L01_P004" (solid, remove dead copper, pour order 4): 34.4,124.125 34.4,121.875 66.525,121.875 66.775,122.125 66.775,124.125
4V2 on Top Layer "4V2_L01_P003" (solid, remove dead copper, pour order 3): 67,84.112 67,81.9 73.25,81.9 73.25,84.137
3V3 on Top Layer "3V3_L01_P002" (solid, remove dead copper, pour order 2): 67,80.75 67,81.375 73.15,81.375 73.15,80.75
5V on Top Layer "5V_L01_P001" (solid, remove dead copper, pour order 1): 66.9,80.125 66.9,79.25 76.625,79.25 76.625,80.125
VCC on Top Layer "VCC_L01_P000" (solid, remove dead copper, pour order 0): 66.875,79 66.875,75.5 73.25,75.5 73.25,79
GND on Bottom Layer "GND_L04_P010" (solid, remove dead copper, pour order 10): 20.599,127.914 20.612,127.9 80.4,127.9 80.4,75.2 80.3,75.1 20.6,75.1
GND on Layer 2 "GND_L03_P012" (solid, remove dead copper, pour order 12): 20.7,127.9 20.6,127.8 20.6,75.1 80.4,75.1 80.4,127.9
GND on Layer 1 "GND_L02_P013" (solid, remove dead copper, pour order 13): 20.6,127.9 20.6,75.1 80.4,75.1 80.4,127.9